# Altium PCB SNA.PcbDoc (part 1 of 6)
Units mm, origin at the board's own origin, x right, y up, seen from the top; angles counter-clockwise.
Board outline 122 x 98 mm, 4 copper layers (L1 Top Layer, L2 Inner 1, L3 Inner 2, L4 Bottom Layer), stack 1.588 mm thick; 466 components, 299 nets, 1366 pads, 4218 vias.
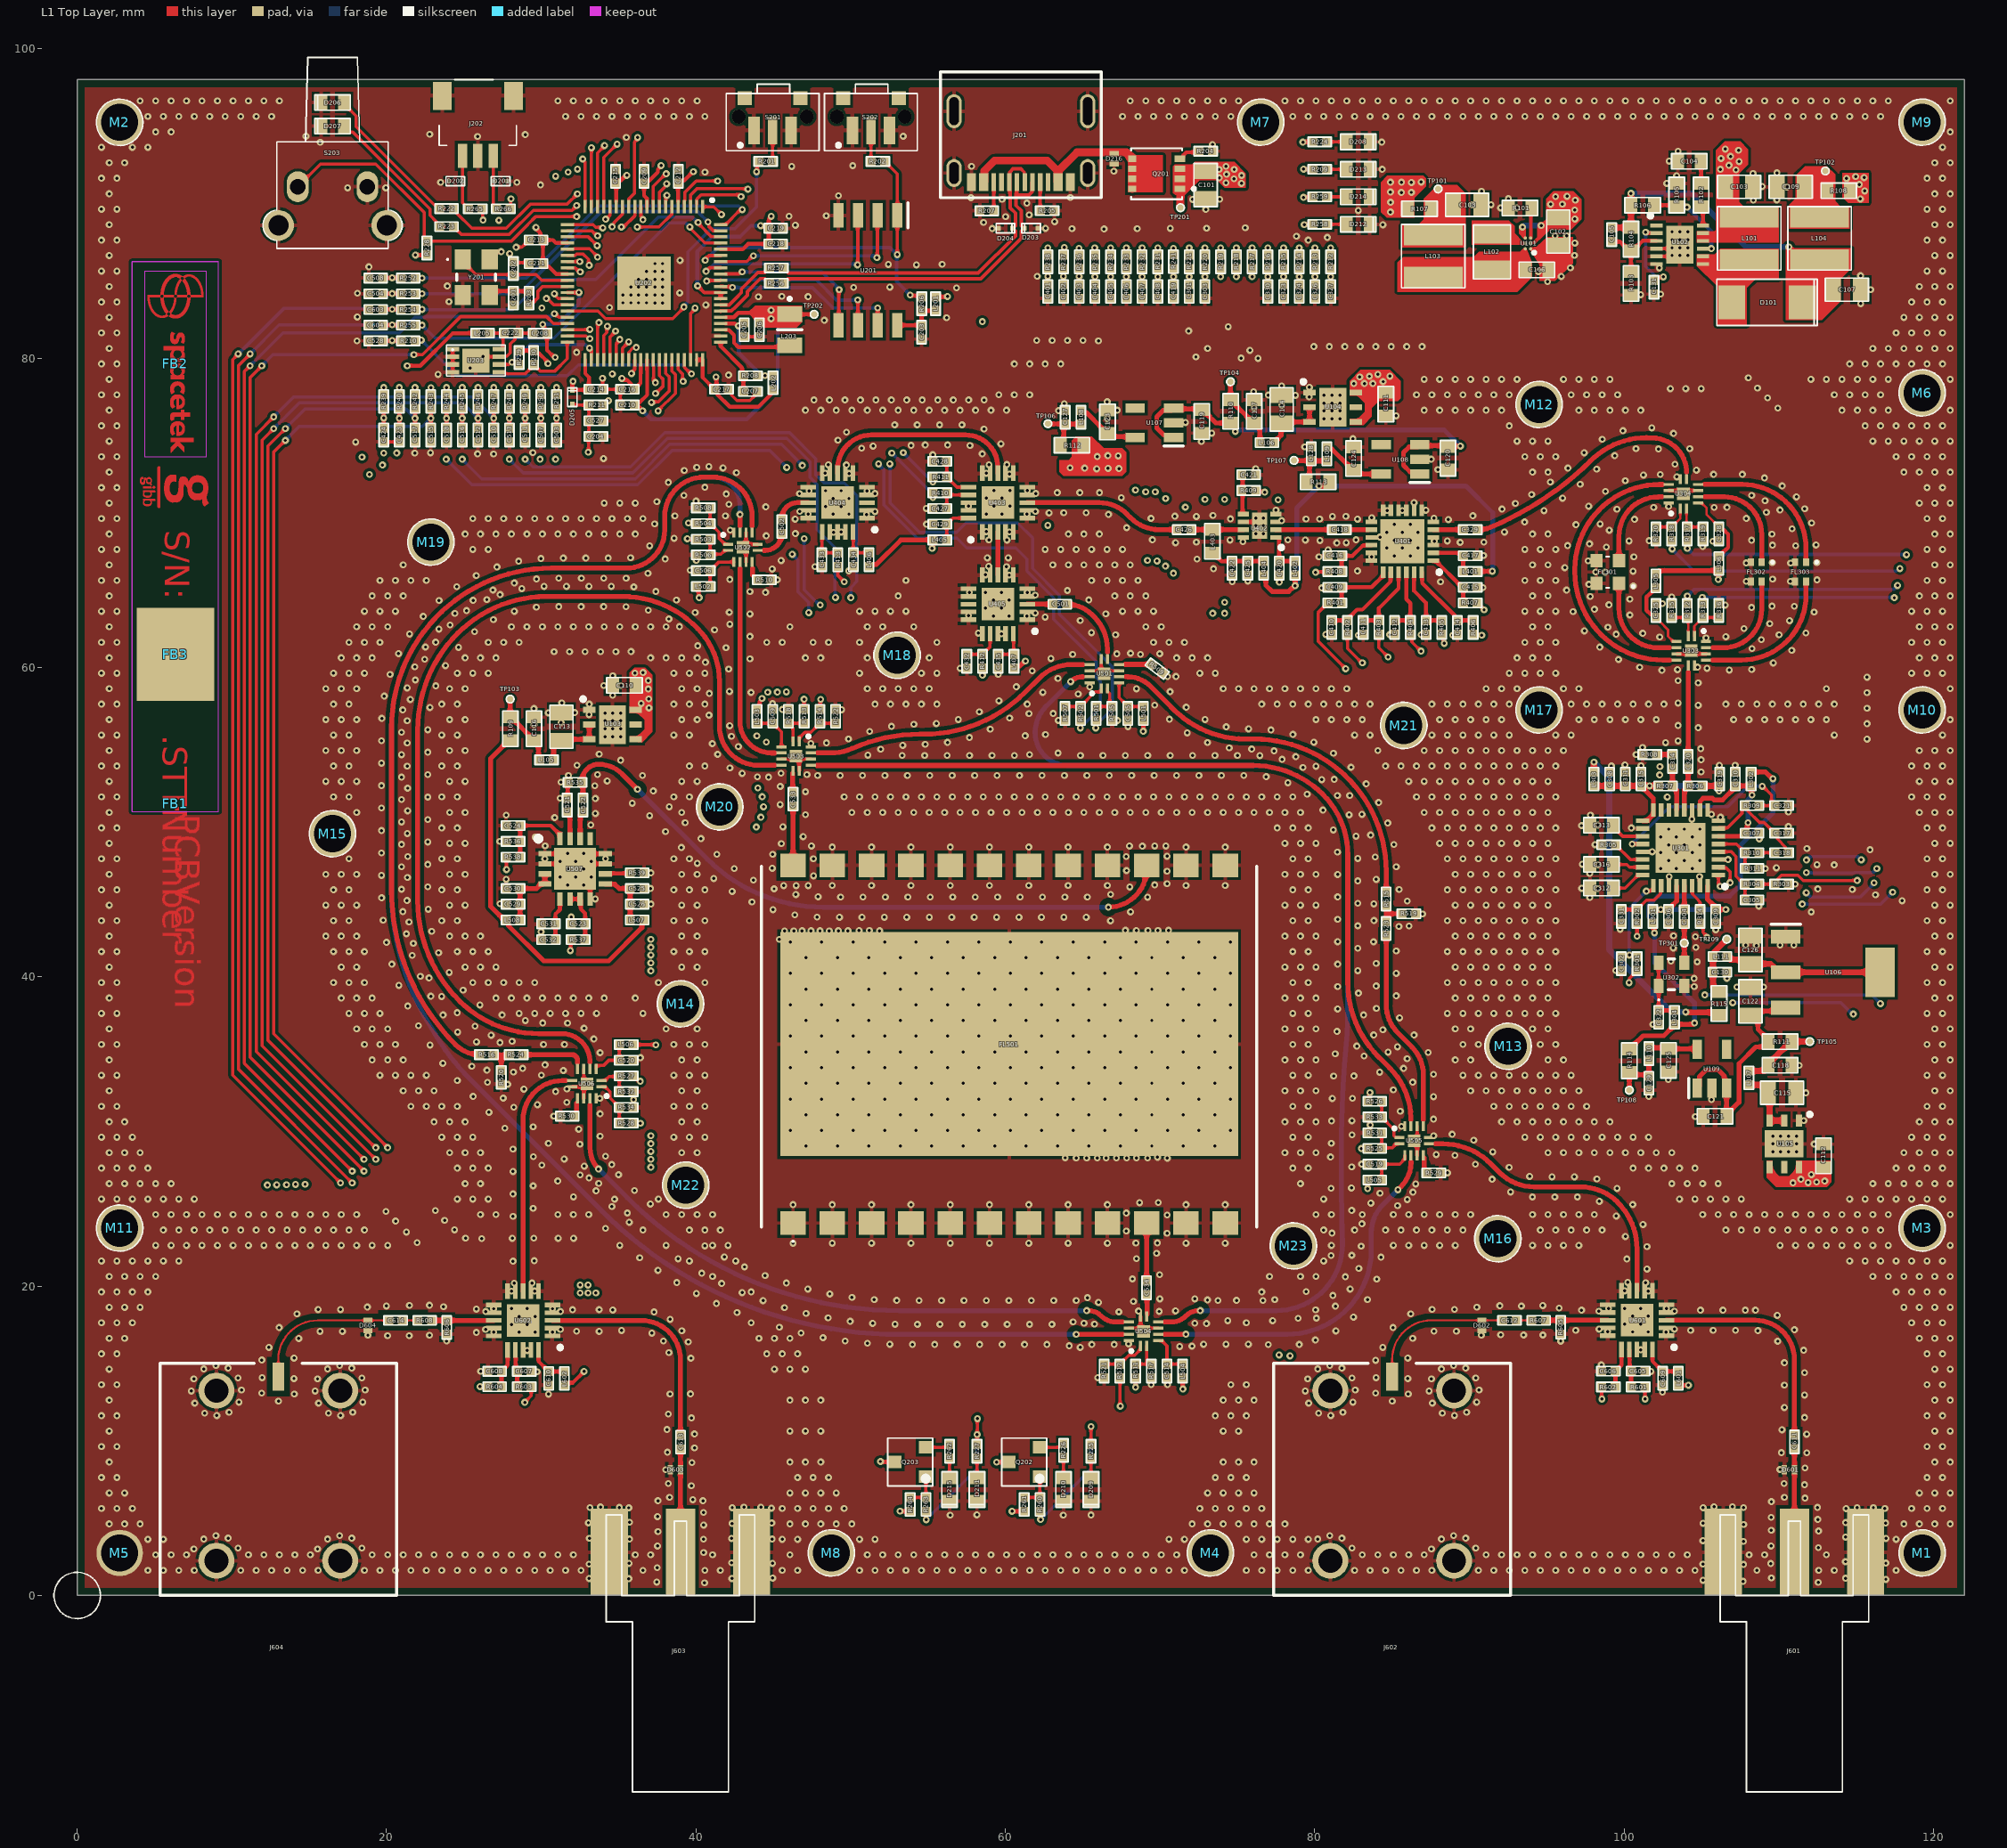
[diagram p0: L1 Top Layer view]
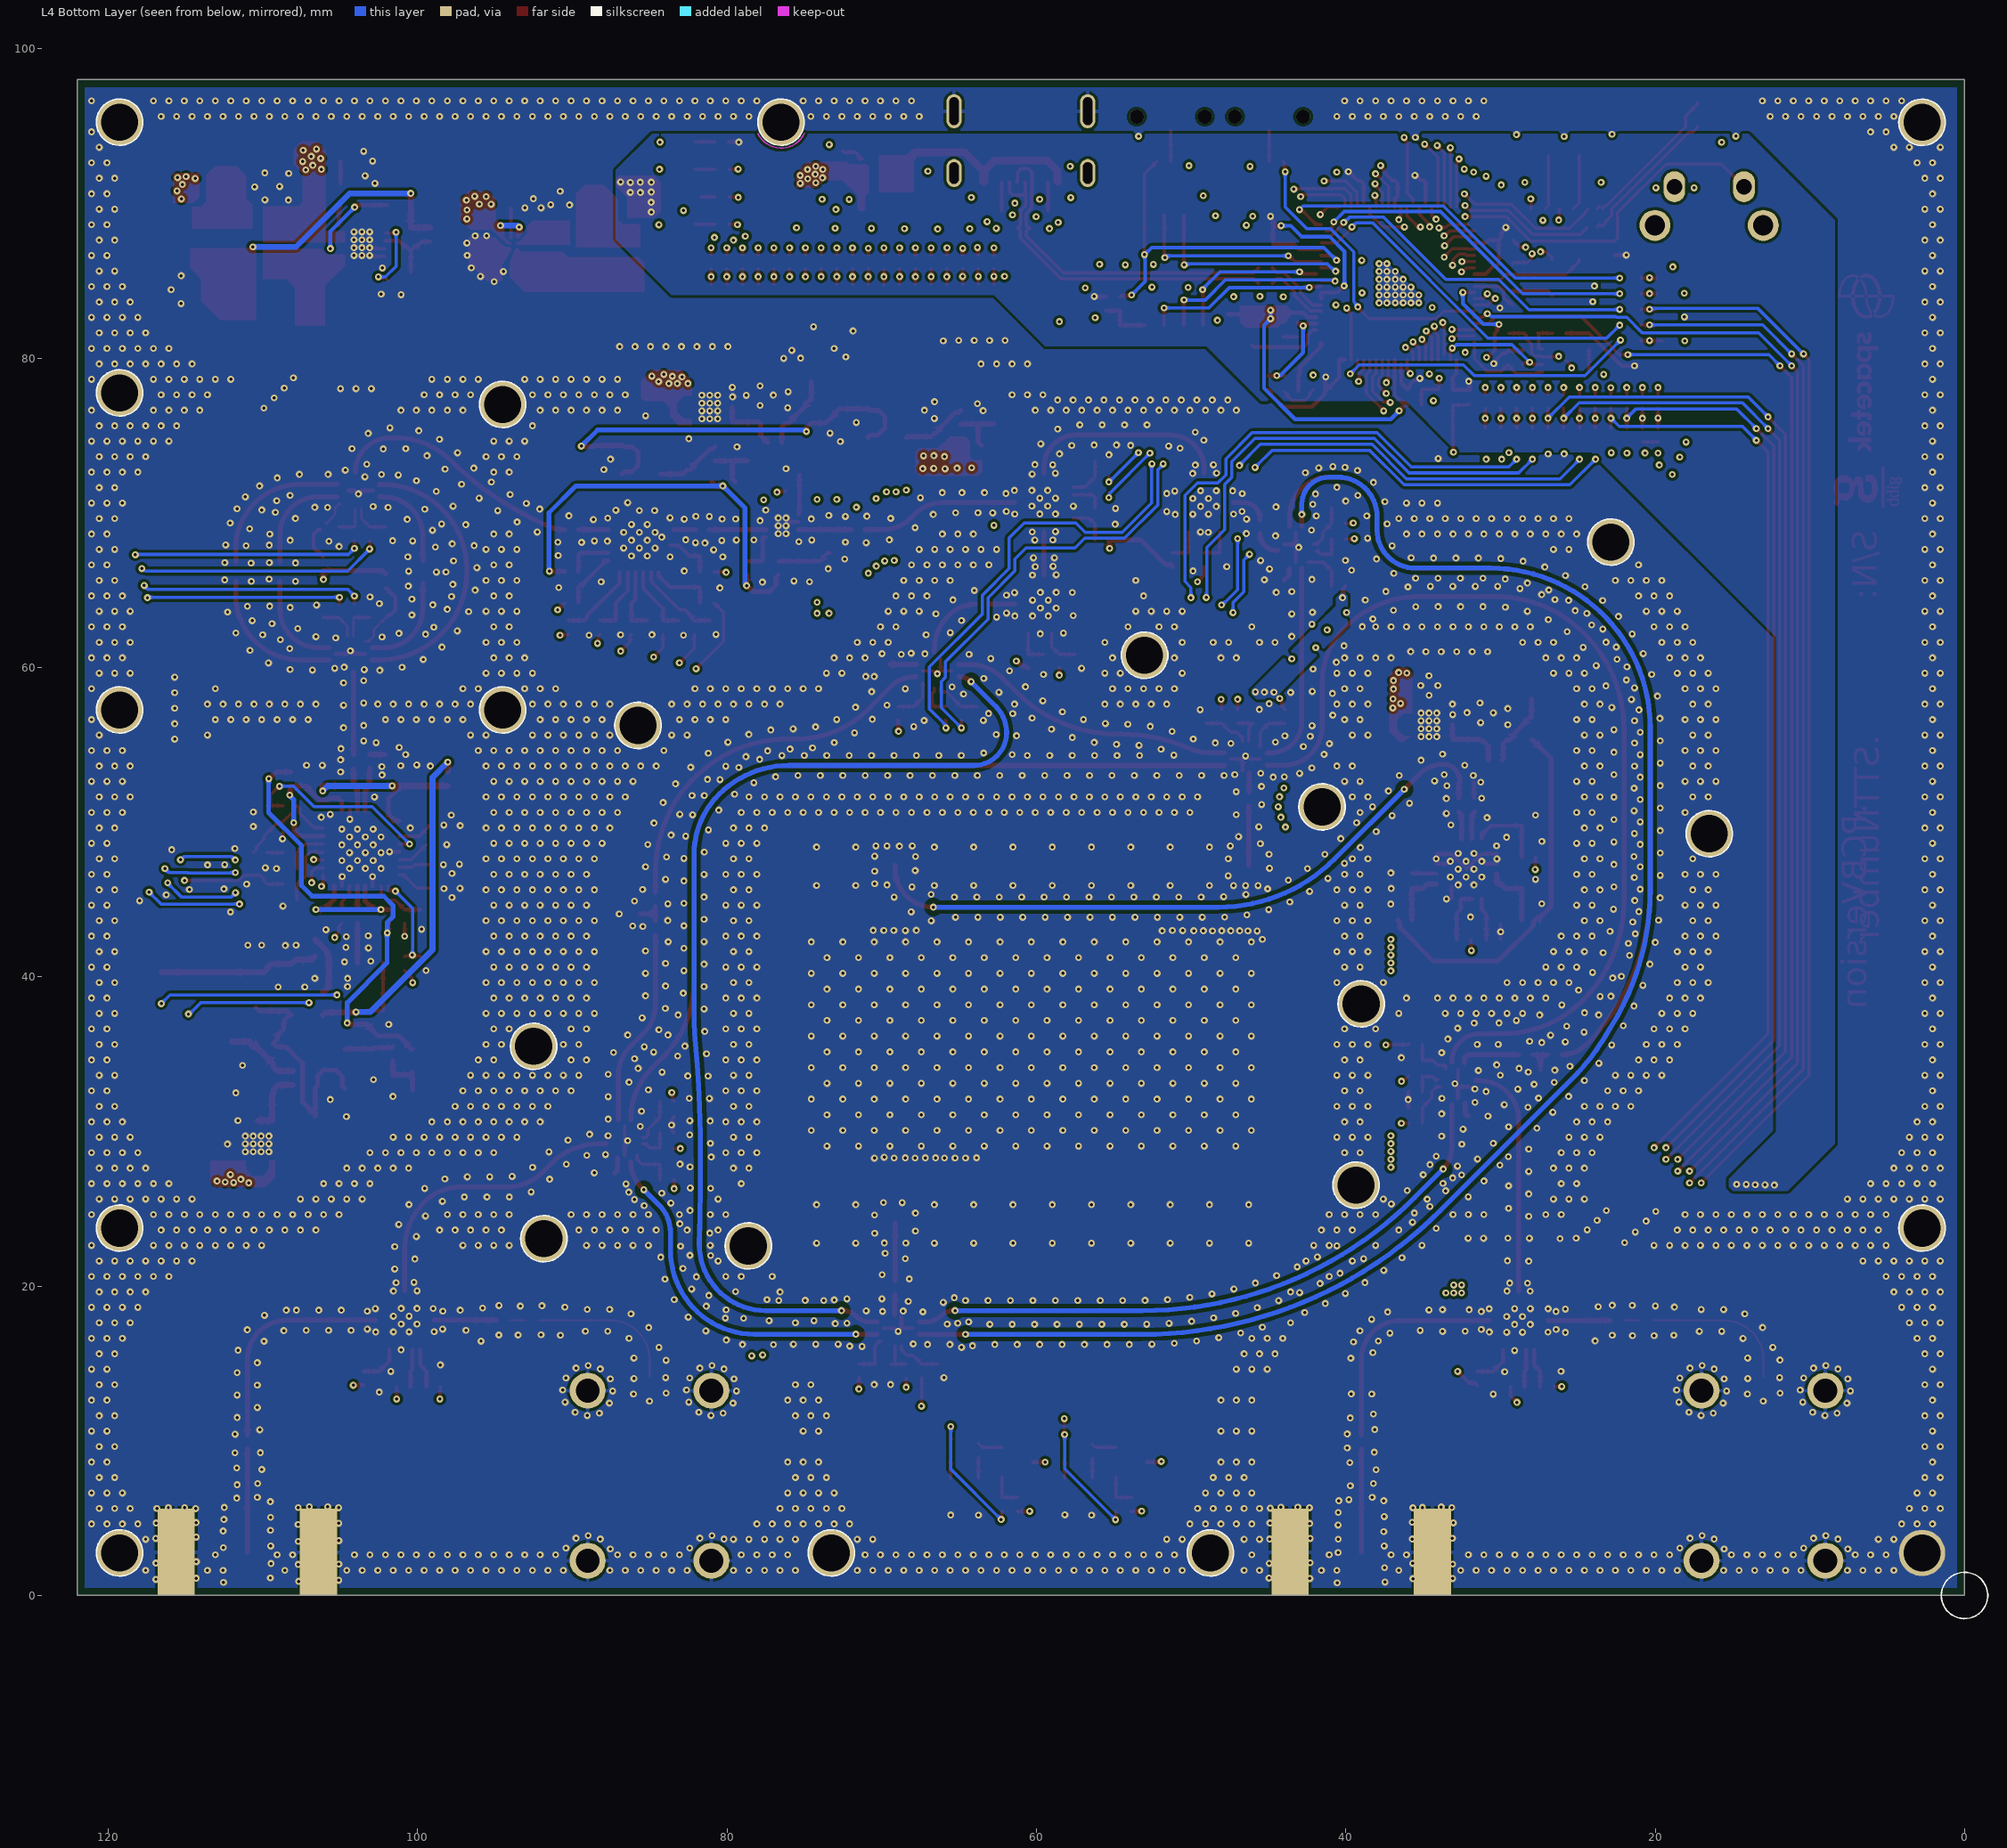
[diagram p1: L4 Bottom Layer view, seen from below]
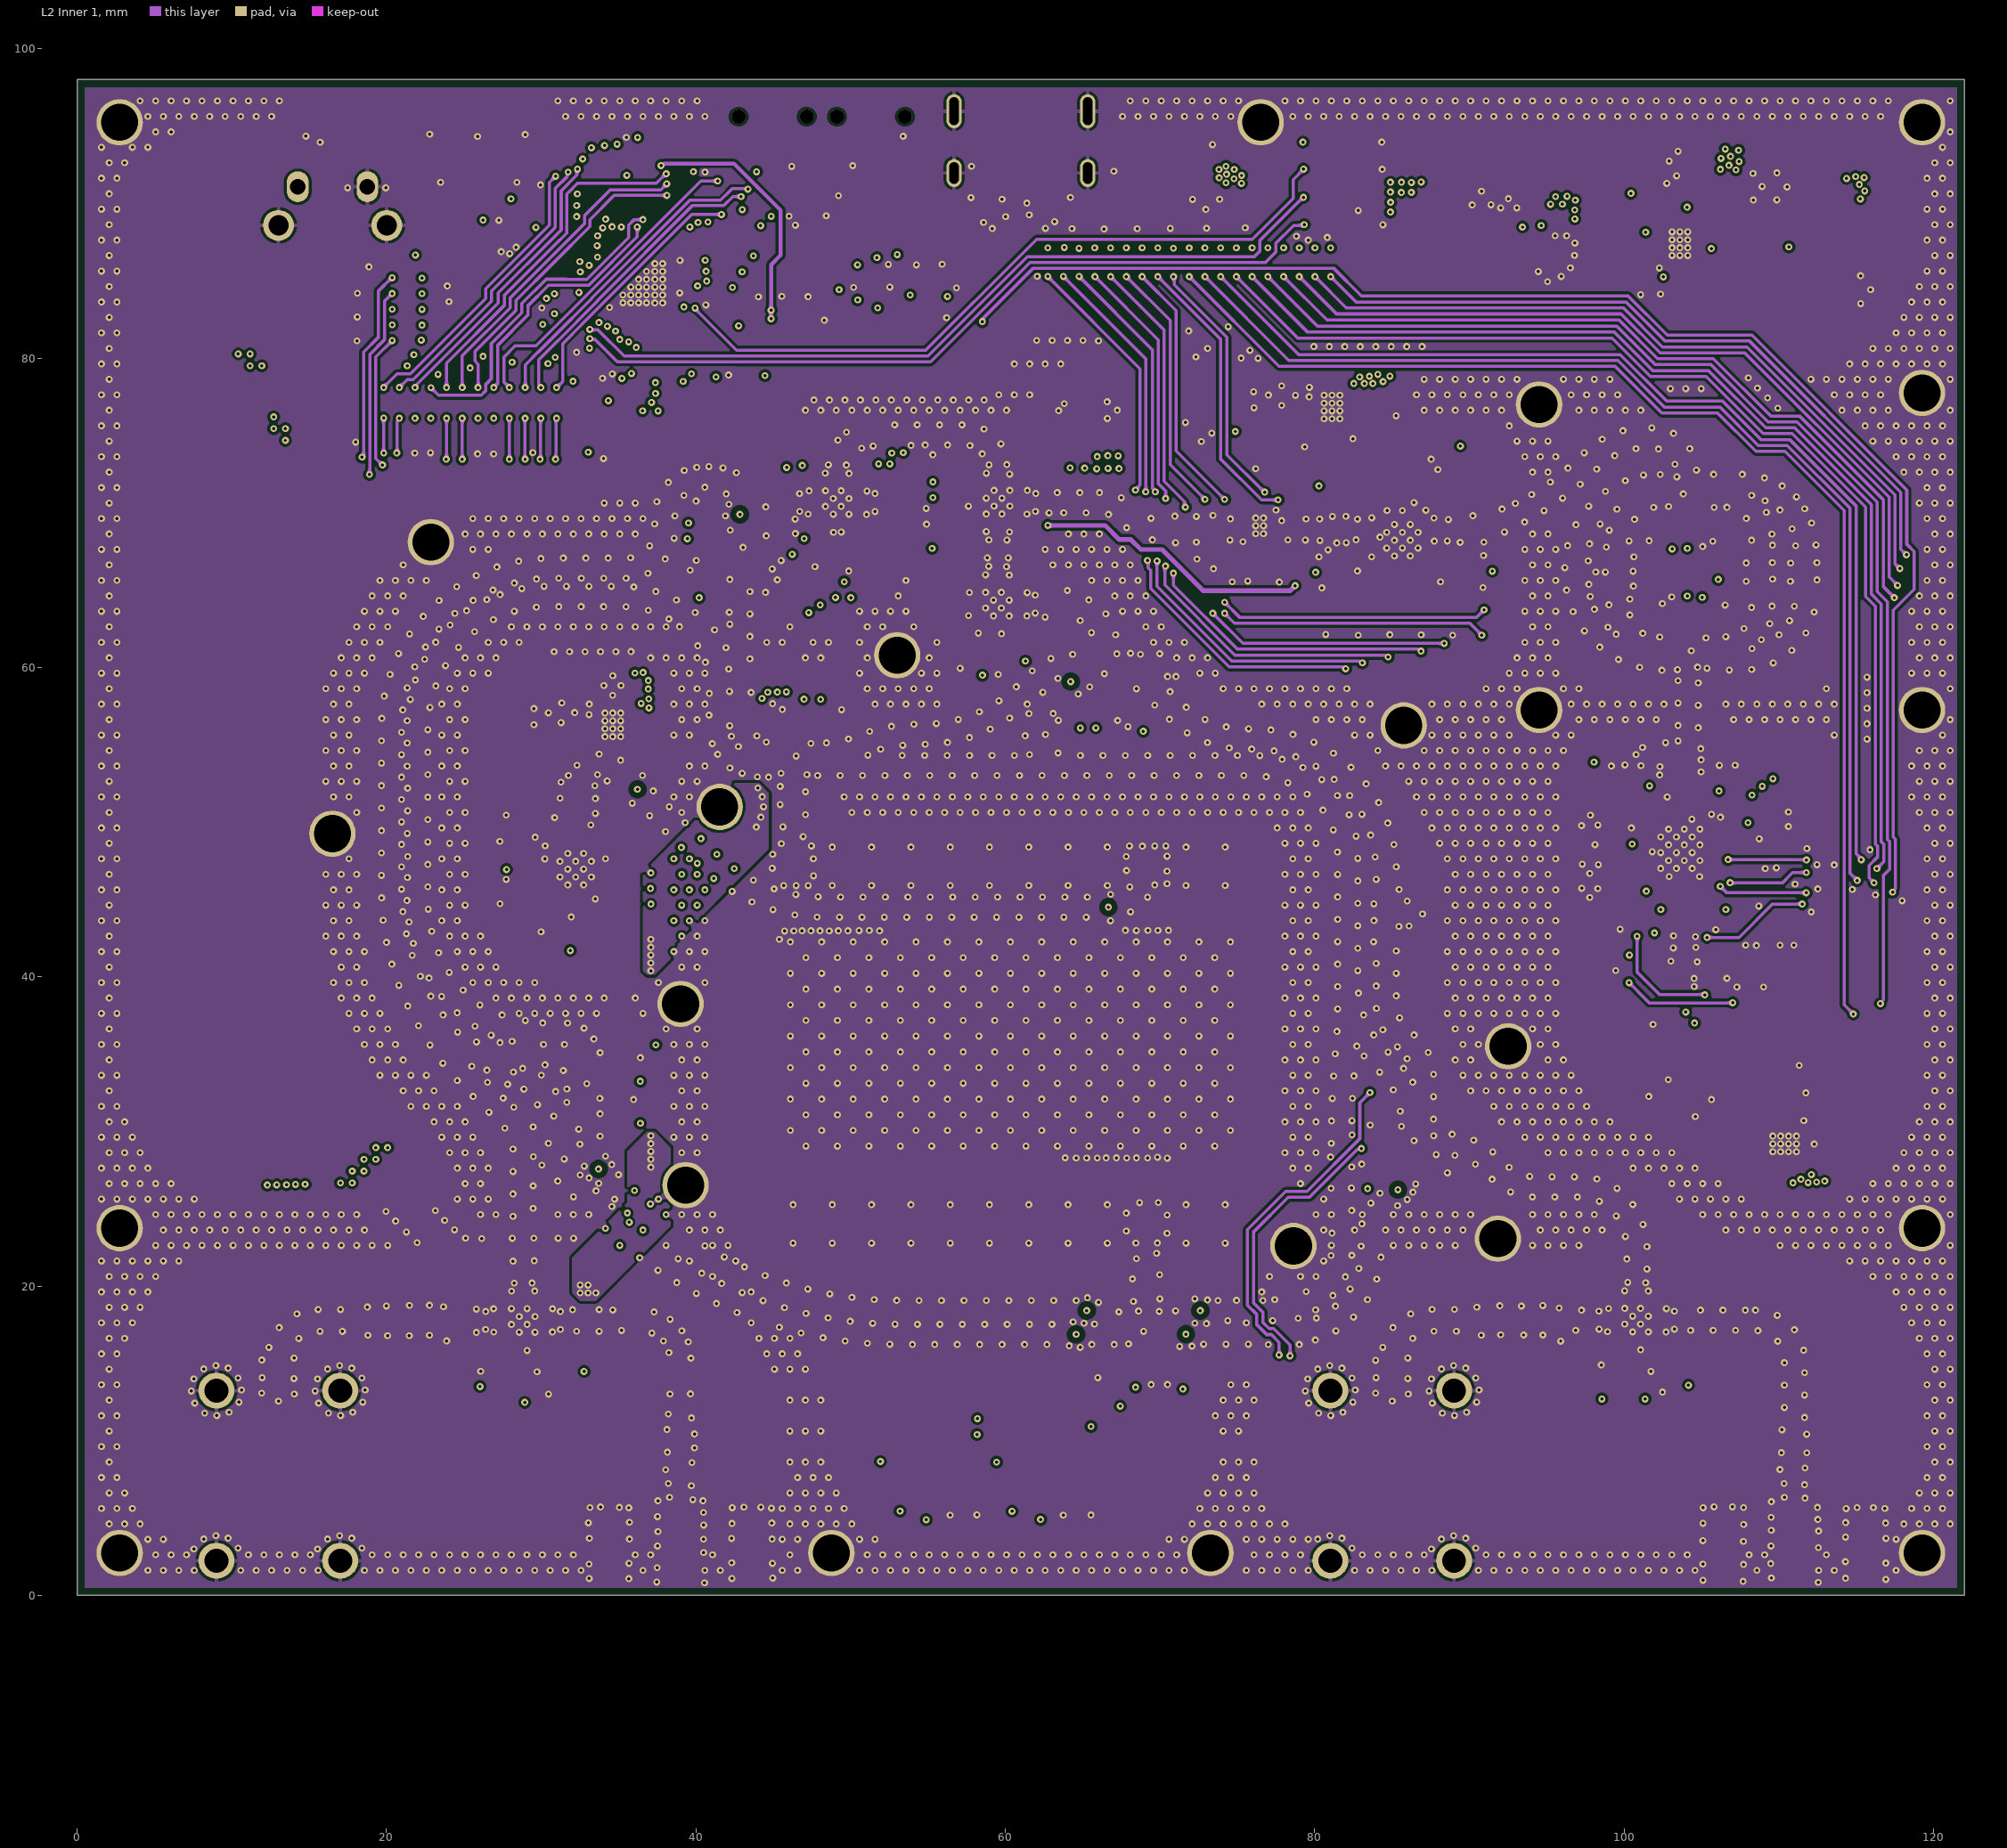
[diagram p2: L2 Inner 1]
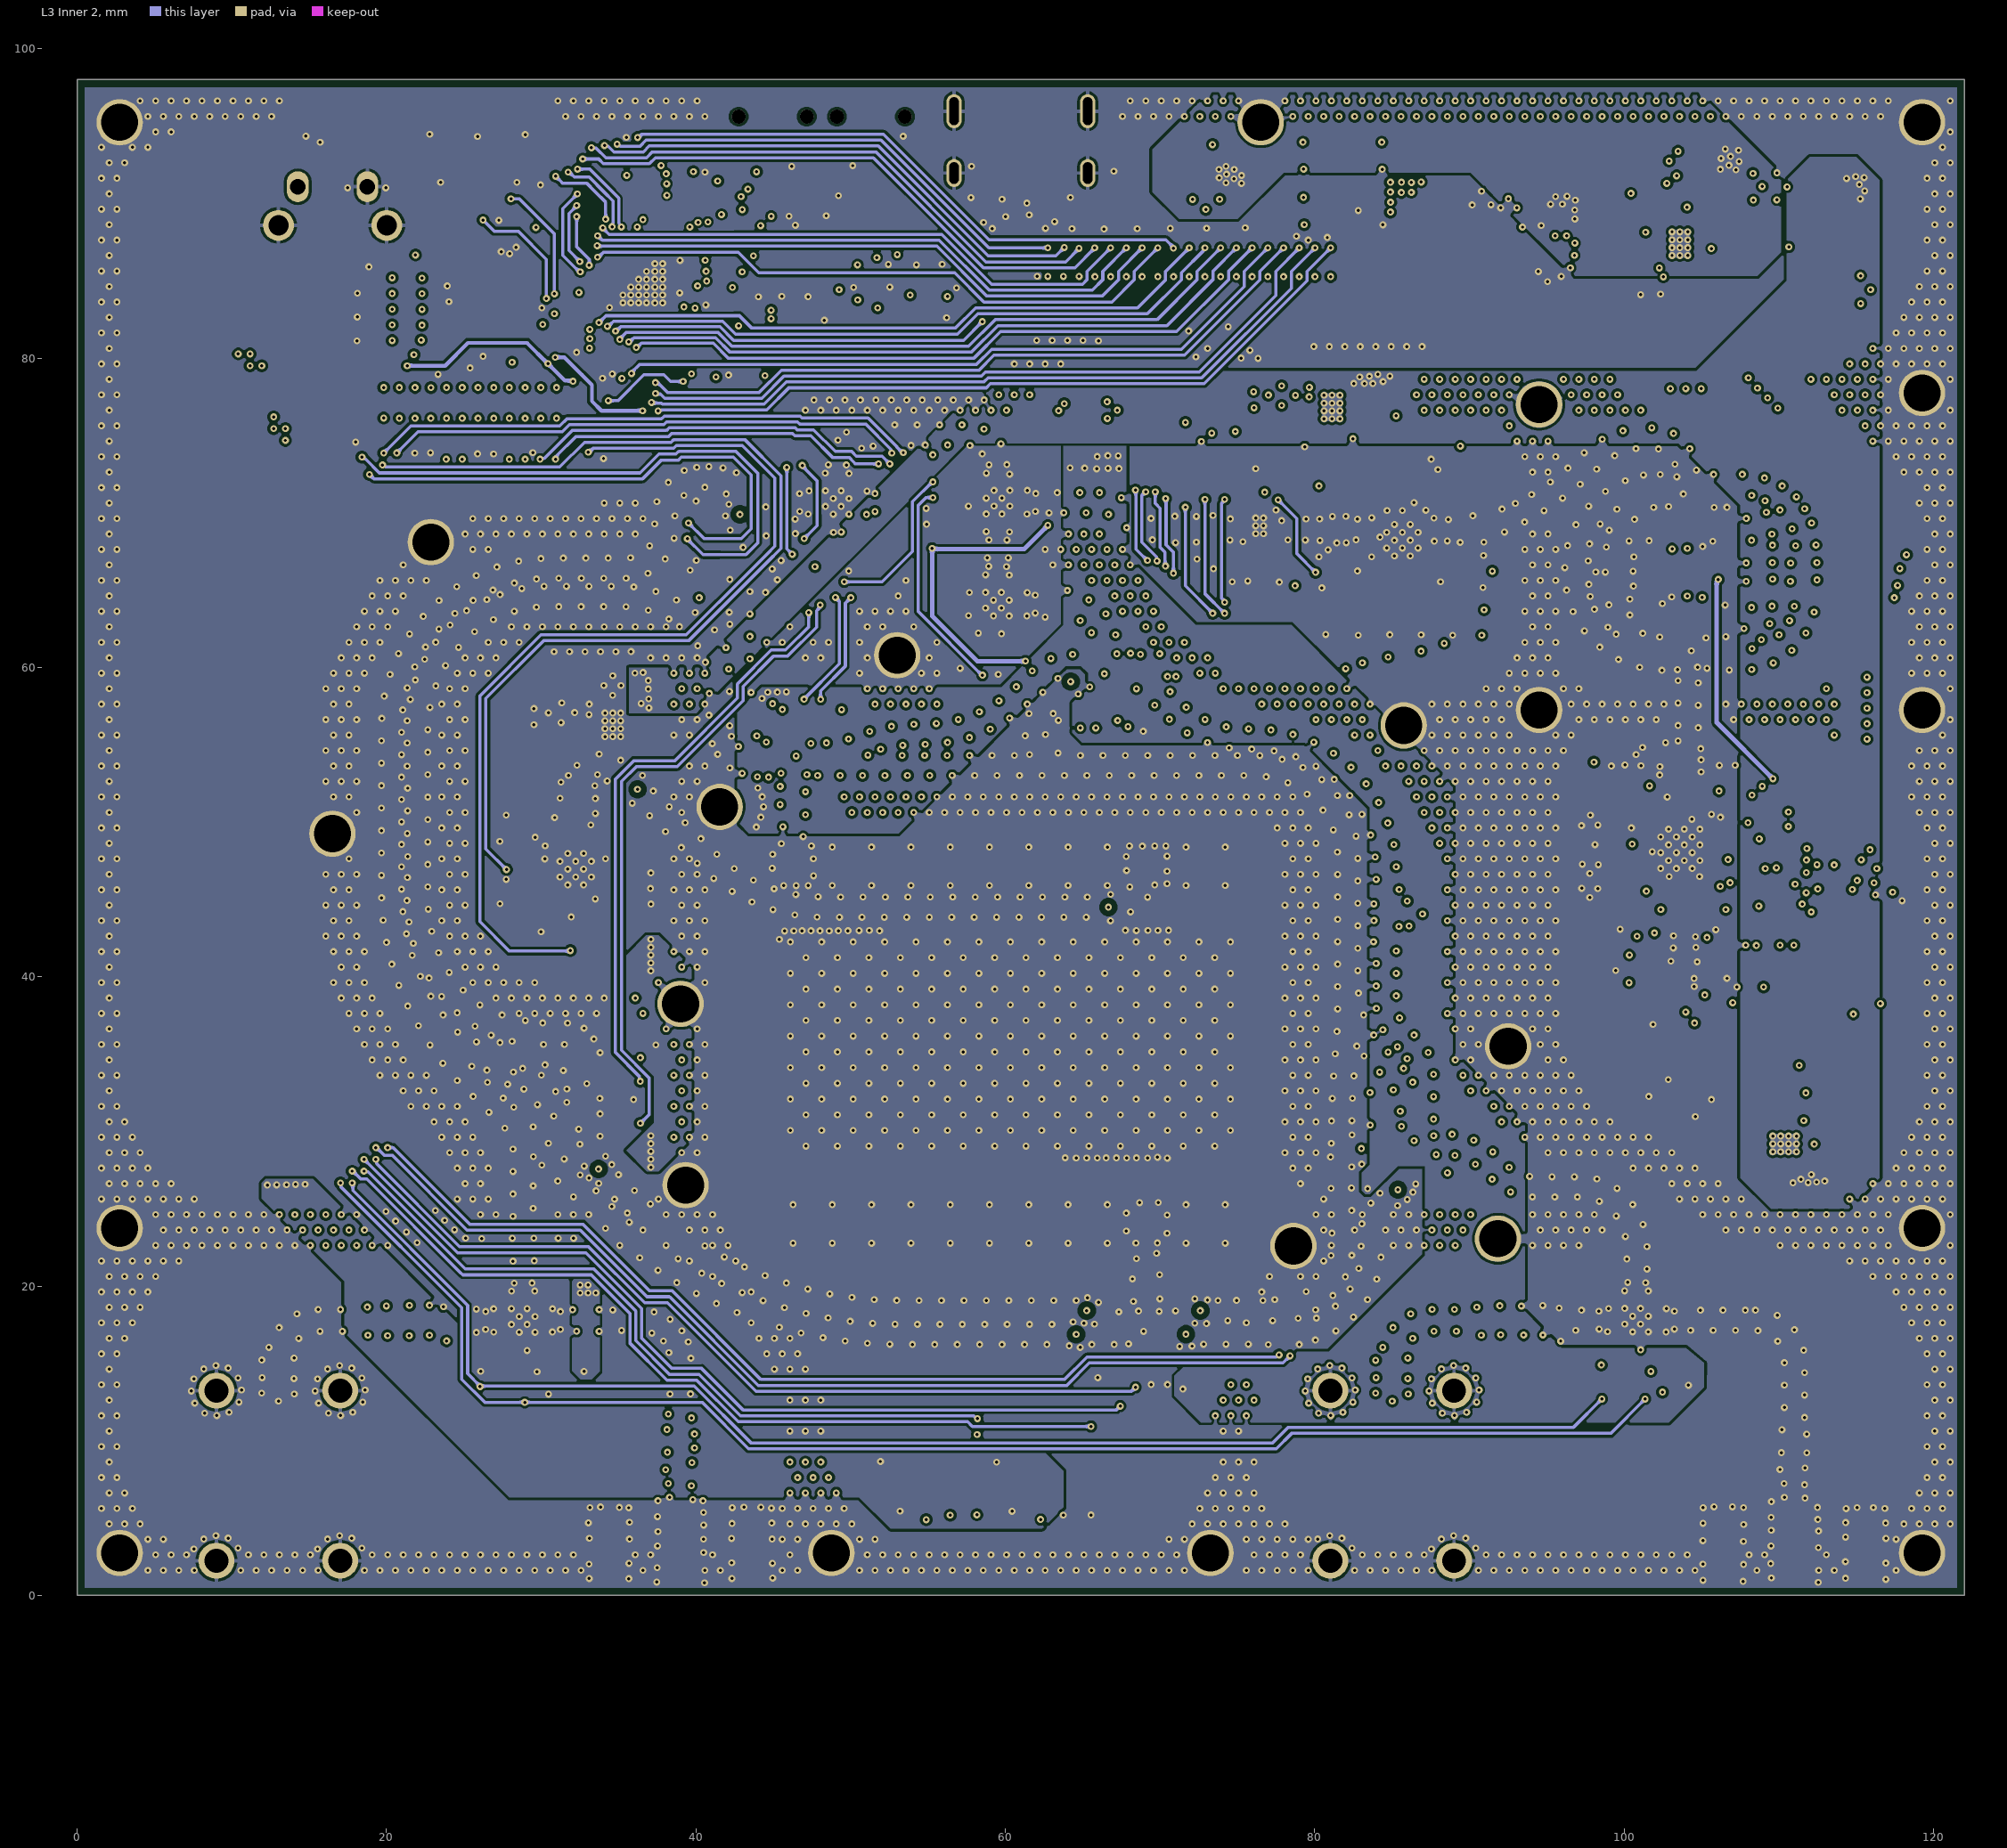
[diagram p3: L3 Inner 2]

## Layer stack, top to bottom
Top Solder 1: solder mask 0.0102, Solder Resist, Dk 3.5
L1 Top Layer: signal copper 0.036
Dielectric1: prepreg 0.2104, Prepreg, Dk 4.7
L2 Inner 1: signal copper 0.0152
Dielectric2: core 1.065, FR4, Dk 4.7
L3 Inner 2: signal copper 0.0152
Dielectric3: prepreg 0.2104, Prepreg, Dk 4.7
L4 Bottom Layer: signal copper 0.036
Bottom Solder 1: solder mask 0.0102, Solder Resist, Dk 3.5

## Board outline
0,0 122,0 122,98 0,98

## Design rules (kind name [scope] priority, off if disabled: settings)
BoardOutlineClearance BoardOutlineClearance-User [All] p1: gap=0.5 ignorepadtopadclearanceinfootprint=FALSE except(0: Arc-SplitBarrior Arc-SplitContinuation Track-SplitBarrior Track-SplitContinuation SMDPad-SplitBarrior SMDPad-SplitContinuation THPad-SplitBarrior THPad-SplitContinuation Via-SplitBarrior Via-SplitContinuation Fill-SplitBarrior Fill-SplitContinuation Poly-SplitBarrior Poly-SplitContinuation Region-SplitBarrior Region-SplitContinuation Text-SplitBarrior Text-SplitContinuation)
Clearance Clearance_Diff_Pair [InNetClass('USB_D')] p1: gap=0.152 ignorepadtopadclearanceinfootprint=FALSE
Clearance Clearance_Room [WithinRoom(     'Clearance',     'Clearance_1',     'Clearance_2',     'Clearance_3',     'Clearance_4',     'Clearance_5',     'Clearance_6',     'Clearance_7',     'Clearance_8',     'Clearance_9',     'Clearance_10',     'Clearance_11',     'Clearance_12',     'Clearance_13',     'Clearance_14',     'Clearance_15',     'Clearance_16',     'Clearance_17',     'Clearance_18',     'Clearance_19',     'Clearance_20',     'Clearance_21',     'Clearance_22',     'Clearance_23',     'Clearance_24',     'Clearance_25',     'Clearance_26',     'Clearance_27',     'Clearance_28',     'Clearance_29',     'Clearance_30',     'Clearance_31',     'Clearance_32',     'Clearance_33',     'Clearance_34',     'Clearance_35',     'Clearance_36',     'Clearance_37',     'Clearance_38',     'Clearance_39',     'Clearance_40' )] p2: gap=0.152 ignorepadtopadclearanceinfootprint=TRUE
Clearance Clearance_75_SE_Via [IsVia and InNetClass('SE_75') vs InNetClass('SE_75')] p3: gap=0.159 ignorepadtopadclearanceinfootprint=TRUE
Clearance Clearance_50_SE_Via [IsVia and InNetClass('SE_50')] p4: gap=0.358 ignorepadtopadclearanceinfootprint=TRUE
Clearance Clearance_75_SE [All vs InNetClass('SE_75')] p5: gap=0.381 ignorepadtopadclearanceinfootprint=TRUE
Clearance Clearance_50_SE [All vs InNetClass('SE_50')] p6: gap=0.254 ignorepadtopadclearanceinfootprint=TRUE
Clearance "Schematic Clearance Constraint_1" [InNetClass('USB_D')] p7: gap=0.178 ignorepadtopadclearanceinfootprint=TRUE
Clearance Clearance_main [All] p8: gap=0.178 ignorepadtopadclearanceinfootprint=TRUE
Clearance SN [HasFootprint('STT--DO--SN')] p9: gap=0.1 ignorepadtopadclearanceinfootprint=FALSE
Clearance ClearanceDiffPairs [(InDifferentialPairClass('All Differential Pairs'))] p10: gap=0.3 ignorepadtopadclearanceinfootprint=FALSE except(0: Arc-Hole Track-Hole SMDPad-Hole THPad-Hole Via-Hole Fill-Hole Poly-Hole Region-Hole Text-Hole; 0.2: Arc-Track Track-Track Track-THPad Track-Via)
ComponentClearance [All] p1: gap=0.254 collisioncheckmode=3 verticalgap=0 showdistances=FALSE
DiffPairsRouting "Schematic Differential Pairs Routing_1" [InNetClass('USB_D')] p1: maxlimit=0.152 minlimit=0.152 mostfreqgap=0.152 toplayer_minwidth=0.228 toplayer_maxwidth=0.228 toplayer_prefwidth=0.228 midlayer1_minwidth=0.228 midlayer1_maxwidth=0.228 midlayer1_prefwidth=0.228 midlayer4_minwidth=0.228 midlayer4_maxwidth=0.228 midlayer4_prefwidth=0.228 bottomlayer_minwidth=0.228 bottomlayer_maxwidth=0.228 bottomlayer_prefwidth=0.228 maxuncoupledlength=12.7
DiffPairsRouting [All] p2: maxlimit=0.6 minlimit=0.2 mostfreqgap=0.2 toplayer_minwidth=0.2 toplayer_maxwidth=1 toplayer_prefwidth=0.2 midlayer1_minwidth=0.2 midlayer1_maxwidth=1 midlayer1_prefwidth=0.2 midlayer4_minwidth=0.2 midlayer4_maxwidth=1 midlayer4_prefwidth=0.2 bottomlayer_minwidth=0.2 bottomlayer_maxwidth=1 bottomlayer_prefwidth=0.2 maxuncoupledlength=12.7
HoleSize [All] p1: absolutevalues=TRUE maxlimit=6 minlimit=0.178 maxpercent=80.000 minpercent=20.000
HoleToHoleClearance [All] p1: gap=0.3 allowstackedmicrovias=TRUE
MinimumSolderMaskSliver [All] p1: minsoldermaskwidth=0
PermittedLayers "Schematic Permitted Layers Rule" [InNet('NetFB3_1')] p1: toplayerpermitted=TRUE bottomlayerpermitted=FALSE
PlaneClearance [All] p1: clearance=0.5
PlaneConnect PlaneConnect_Vias [IsVia] p1: planeconnectstyle=Direct reliefexpansion=0.508 reliefentries=4 reliefconductorwidth=0.254 reliefairgap=0.254
PlaneConnect [All] p2: planeconnectstyle=Relief reliefexpansion=0.5 reliefentries=4 reliefconductorwidth=0.508 reliefairgap=0.178
PolygonConnect PolygonConnect_Vias [IsVia] p1: connectstyle=Direct reliefconductorwidth=0.4 reliefentries=4 polygonreliefangle="90 Angle" airgapwidth=0.3
PolygonConnect PolygonConnect_Direct-Connect [HasCompParameterValue('poly_direct_connect','true')] p2: connectstyle=Direct reliefconductorwidth=0.4 reliefentries=4 polygonreliefangle="90 Angle" airgapwidth=0.3
PolygonConnect [Not IsVia] p3: connectstyle=Relief reliefconductorwidth=0.254 reliefentries=4 polygonreliefangle="90 Angle" airgapwidth=0.178
RoomDefinition Gibb-Logo_No-Net [False vs False] p1: confinementstyle=ConfineIn formatcopy=TRUE lockcomponents=FALSE outline 3.75,73.235 8.835,73.235 8.835,69.753 3.75,69.753
RoomDefinition Clearance_31 [False vs False] p2: confinementstyle=ConfineIn formatcopy=TRUE lockcomponents=FALSE outline 19.396,18.265 18.196,18.265 18.196,16.655 19.396,16.655
RoomDefinition Clearance_30 [False vs False] p3: confinementstyle=ConfineIn formatcopy=TRUE lockcomponents=FALSE outline 91.396,18.266 90.196,18.266 90.196,16.657 91.396,16.657
RoomDefinition Clearance_29 [False vs False] p4: confinementstyle=ConfineIn formatcopy=TRUE lockcomponents=FALSE outline 30.799,78.922 42.564,78.922 42.564,90.745 30.799,90.745
RoomDefinition Clearance_28 [False vs False] p5: confinementstyle=ConfineIn formatcopy=TRUE lockcomponents=FALSE outline 106.677,87.536 104.453,87.536 104.453,86.566 106.677,86.566
RoomDefinition Clearance_27 [False vs False] p6: confinementstyle=ConfineIn formatcopy=TRUE lockcomponents=FALSE outline 94.377,88.211 93.177,88.211 93.177,86.611 94.377,86.611
RoomDefinition Clearance_26 [False vs False] p7: confinementstyle=ConfineIn formatcopy=TRUE lockcomponents=FALSE outline 44.561,66.241 44.561,69.291 41.511,69.291 41.511,66.241
RoomDefinition Clearance_1 [False vs False] p8: confinementstyle=ConfineIn formatcopy=TRUE lockcomponents=FALSE outline 30.157,17.029 31.474,17.029 31.474,18.553 30.157,18.553
RoomDefinition Clearance_22 [False vs False] p9: confinementstyle=ConfineIn formatcopy=TRUE lockcomponents=FALSE outline 47.857,71.369 46.504,71.369 46.504,69.845 47.857,69.845
RoomDefinition Clearance_23 [False vs False] p10: confinementstyle=ConfineIn formatcopy=TRUE lockcomponents=FALSE outline 60.797,63.338 62.162,63.338 62.162,64.862 60.797,64.862
RoomDefinition Clearance_5 [False vs False] p11: confinementstyle=ConfineIn formatcopy=TRUE lockcomponents=FALSE outline 103.129,46.338 103.129,44.232 104.653,44.232 104.653,46.338
RoomDefinition Clearance_4 [False vs False] p12: confinementstyle=ConfineIn formatcopy=TRUE lockcomponents=FALSE outline 104.399,50.255 104.399,52.361 102.875,52.361 102.875,50.255
RoomDefinition Clearance_25 [False vs False] p13: confinementstyle=ConfineIn formatcopy=TRUE lockcomponents=FALSE outline 64.87,58.065 67.92,58.065 67.92,61.115 64.87,61.115
RoomDefinition Clearance_24 [False vs False] p14: confinementstyle=ConfineIn formatcopy=TRUE lockcomponents=FALSE outline 60.809,69.89 62.162,69.89 62.162,71.414 60.809,71.414
RoomDefinition Clearance_21 [False vs False] p15: confinementstyle=ConfineIn formatcopy=TRUE lockcomponents=FALSE outline 49.898,71.956 49.898,73.303 48.374,73.303 48.374,71.956
RoomDefinition Clearance_18 [False vs False] p16: confinementstyle=ConfineIn formatcopy=TRUE lockcomponents=FALSE outline 60.229,71.928 60.229,73.303 58.705,73.303 58.705,71.928
RoomDefinition Clearance_17 [False vs False] p17: confinementstyle=ConfineIn formatcopy=TRUE lockcomponents=FALSE outline 58.751,69.359 58.751,68.003 60.275,68.003 60.275,69.359
RoomDefinition Clearance_16 [False vs False] p18: confinementstyle=ConfineIn formatcopy=TRUE lockcomponents=FALSE outline 60.26,65.344 60.26,66.735 58.736,66.735 58.736,65.344
RoomDefinition Clearance_14 [False] p19: confinementstyle=ConfineIn formatcopy=TRUE lockcomponents=FALSE outline 29.563,19.086 29.563,20.43 28.039,20.43 28.039,19.086
RoomDefinition Clearance_13 [False vs False] p20: confinementstyle=ConfineIn formatcopy=TRUE lockcomponents=FALSE outline 47.997,52.742 47.997,55.792 44.947,55.792 44.947,52.742
RoomDefinition Clearance_20 [False vs False] p21: confinementstyle=ConfineIn formatcopy=TRUE lockcomponents=FALSE outline 70.457,15.552 70.457,18.602 67.407,18.602 67.407,15.552
RoomDefinition Clearance_12 [False vs False] p22: confinementstyle=ConfineIn formatcopy=TRUE lockcomponents=FALSE outline 87.942,30.921 84.892,30.921 84.892,27.871 87.942,27.871
RoomDefinition Clearance_19 [False vs False] p23: confinementstyle=ConfineIn formatcopy=TRUE lockcomponents=FALSE outline 31.424,31.561 34.474,31.561 34.474,34.611 31.424,34.611
RoomDefinition Clearance_15 [False vs False] p24: confinementstyle=ConfineIn formatcopy=TRUE lockcomponents=FALSE outline 101.576,19.108 101.576,20.442 100.052,20.442 100.052,19.108
RoomDefinition Clearance_11 [False vs False] p25: confinementstyle=ConfineIn formatcopy=TRUE lockcomponents=FALSE outline 78.935,68.156 78.935,69.681 77.124,69.681 77.124,68.156
RoomDefinition Clearance_10 [False vs False] p26: confinementstyle=ConfineIn formatcopy=TRUE lockcomponents=FALSE outline 74.437,69.722 74.437,68.197 76.248,68.197 76.248,69.722
RoomDefinition Clearance_9 [False vs False] p27: confinementstyle=ConfineIn formatcopy=TRUE lockcomponents=FALSE outline 88.291,68.113 88.291,69.637 87.297,69.637 87.297,68.113
RoomDefinition Clearance_8 [False vs False] p28: confinementstyle=ConfineIn formatcopy=TRUE lockcomponents=FALSE outline 83.041,69.68 83.041,68.156 84.151,68.156 84.151,69.68
RoomDefinition Clearance_6 [False] p29: confinementstyle=ConfineIn formatcopy=TRUE lockcomponents=FALSE outline 105.858,59.551 105.858,62.601 102.808,62.601 102.808,59.551
RoomDefinition Clearance_7 [False vs False] p30: confinementstyle=ConfineIn formatcopy=TRUE lockcomponents=FALSE outline 105.35,69.702 105.35,72.752 102.3,72.752 102.3,69.702
RoomDefinition Clearance [False vs False] p31: confinementstyle=ConfineIn formatcopy=TRUE lockcomponents=FALSE outline 26.174,17.018 27.506,17.018 27.506,18.542 26.174,18.542
RoomDefinition Clearance_2 [False vs False] p32: confinementstyle=ConfineIn formatcopy=TRUE lockcomponents=FALSE outline 102.128,17.029 103.474,17.029 103.474,18.553 102.128,18.553
RoomDefinition Clearance_3 [False vs False] p33: confinementstyle=ConfineIn formatcopy=TRUE lockcomponents=FALSE outline 99.511,18.554 98.174,18.554 98.174,17.03 99.511,17.03
RoutingVias RoutingVias_50_SE [InNetClass('SE_50')] p1: holewidth=0.2 width=0.45 viastyle="Through Hole" minholewidth=0.2 minwidth=0.45 maxholewidth=0.2 maxwidth=0.45
RoutingVias RoutingVias_75_SE [InNetClass('SE_75')] p2: holewidth=0.2 width=0.45 viastyle="Through Hole" minholewidth=0.2 minwidth=0.45 maxholewidth=0.2 maxwidth=0.45
RoutingVias [All] p3: holewidth=0.2 width=0.45 viastyle="Through Hole" minholewidth=0.2 minwidth=0.45 maxholewidth=0.3 maxwidth=0.6
SilkToSilkClearance [All] p1: silktosilkclearance=0
SilkToSolderMaskClearance SilkscreenOverComponentPads [IsPad] p1: minsilkscreentomaskgap=0 clearancetoexposedcopper=TRUE
SolderMaskExpansion SolderMaskExpansionVia [IsVia] p1: expansion=0 istentingtop=TRUE
SolderMaskExpansion [All] p2: expansion=0.1 istentingtop=FALSE
SupplyNets "Schematic Supply Nets_7" [InNet('3.3V RF ATTEN-AMP')] p1: voltage=0.000
SupplyNets "Schematic Supply Nets_13" [InNet('3.3V RF SW.')] p2: voltage=0.000
SupplyNets "Schematic Supply Nets_12" [InNet('6V')] p3: voltage=0.000
SupplyNets "Schematic Supply Nets_10" [InNet('5V')] p4: voltage=0.000
SupplyNets "Schematic Supply Nets_9" [InNet('1.1V')] p5: voltage=0.000
SupplyNets "Schematic Supply Nets_8" [InNet('3.3V RF SRC - RF')] p6: voltage=0.000
SupplyNets "Schematic Supply Nets_6" [InNet('5V RF Log Det.')] p7: voltage=0.000
SupplyNets "Schematic Supply Nets_5" [InNet('3.3V RF SRC - CP')] p8: voltage=0.000
SupplyNets "Schematic Supply Nets_3" [InNet('3.3V')] p9: voltage=0.000
SupplyNets "Schematic Supply Nets_2" [InNet('5V RF SRC')] p10: voltage=0.000
SupplyNets "Schematic Supply Nets_1" [InNet('5V RF')] p11: voltage=0.000
SupplyNets "Schematic Supply Nets" [InNet('GND')] p12: voltage=0.000
UnConnectedPin [All] p1:
UnRoutedNet [Not (WithinRoom('Gibb-Logo_No-Net'))] p1:
Width Width_50_SE [InNetClass('SE_50')] p1: maxlimit=0.32 minlimit=0.32 preferedwidth=0.32
Width Width_75_SE [InNetClass('SE_75')] p2: maxlimit=0.128 minlimit=0.128 preferedwidth=0.128
Width Width_Pwr_1A [InNetClass('1A')] p3: maxlimit=0.508 minlimit=0.381 preferedwidth=0.508
Width Width_Pwr_0.5A [InNetClass('0.5A')] p4: maxlimit=0.381 minlimit=0.254 preferedwidth=0.381
Width Width_Pwr_0.2A [InNetClass('0.2A')] p5: maxlimit=0.305 minlimit=0.254 preferedwidth=0.305
Width LOGO [HasFootprint('STT--DO--Logo')] p6: maxlimit=4 minlimit=0.1 preferedwidth=0.3 minimp=50.000000 maximp=50.000000 favimp=50.000000
Width [All] p7: maxlimit=0.254 minlimit=0.152 preferedwidth=0.203
20 further rules are at their usual default settings.

## Classes and differential pairs
differential pair class USB_D: USB_D USB_D_TER
net class USB_D: USB_D_N USB_D_P USB_D_TER_N USB_D_TER_P
net class SE_75: NetC612_1 NetC612_2 NetC614_1 NetC614_2
net class SE_50: F_REF NetC304_2 NetC314_1 NetC314_2 NetC320_1 NetC320_2 NetC329_1 NetC329_2 NetC418_1 NetC418_2 NetC426_1 NetC426_2 NetC501_1 NetC501_2 NetC502_1 NetC502_2 NetC521_2 NetC522_2 NetC533_1 NetC533_2 NetC534_1 NetC534_2 NetC611_1 NetC611_2 NetC613_1 NetC613_2 NetFL301_1 NetFL301_2 NetFL302_1 NetFL302_2 NetFL303_1 NetFL303_2 NetR509_2 NetR510_2 NetR515_1 NetR516_2 NetR523_2 NetR524_1 NetR529_2 NetR530_2 NetR605_1 NetR606_1 NetU303_6 NetU403_3 NetU403_13 NetU501_9 NetU501_11 NetU502_4 NetU502_11 NetU503_6 NetU503_9 NetU504_4 NetU504_9 NetU505_7 NetU506_7 RF_COUPLED
net class 1A: 5V 6V NetC105_2 NetC109_2 NetD216_2
net class 0.5A: 3.3V "3.3V RF SRC - RF" "5V RF SRC" NetC106_2 NetC108_2 NetC115_2 NetC118_2 NetC126_2 NetC130_2 NetC308_1
net class 0.2A: 1.1V "3.3V RF ATTEN-AMP" "3.3V RF SRC - CP" "3.3V RF SW." "5V RF" "5V RF Log Det." NetC113_2 NetC114_2 NetC116_2 NetC117_2 NetC123_2 NetC124_2 NetC125_2 NetC127_2 NetC128_2 NetC129_2 NetC203_2 NetC205_2 NetC306_1 NetC307_1 NetC417_1 NetC420_2 NetC422_2 NetC525_2 NetC529_2
component class "U_RF Source": C301 C302 C303 C304 C305 C306 C307 C308 C309 C310 C311 C312 C313 C314 C315 C316 C317 C318 C319 C320 C321 C322 C323 C324 C325 C326 C327 C328 C329 C330 C331 FL301 FL302 FL303 L301 L302 L303 L304 L305 L306 R301 R302 R303 R304 R305 R306 R307 R308 R309 R310 R311 R312 R313 R314 R315 R316 R317 R318 R319 R320 TP301 U301 U302 U303 U304
component class "U_RF Ports": C603 C604 C605 C606 C607 C608 C609 C610 C611 C612 C613 C614 D601 D602 D603 D604 J601 J602 J603 J604 L601 L602 R601 R602 R603 R604 R605 R606 R607 R608 U601 U602
component class "U_RF Direction Coupler": C501 C502 C503 C504 C505 C506 C507 C508 C509 C510 C511 C512 C513 C514 C515 C516 C517 C518 C519 C520 C521 C522 C523 C524 C525 C526 C527 C528 C529 C530 C531 C532 C533 C534 FL501 L501 L502 L503 L504 L505 L506 L507 L508 R501 R502 R503 R504 R505 R506 R507 R508 R509 R510 R511 R512 R513 R514 R515 R516 R517 R518 R519 R520 R521 R522 R523 R524 R525 R526 R527 R528 R529 R530 R531 R532 R533 R534 R535 R536 R537 R538 R539 U501 U502 U503 U504 U505 U506 U507
component class "U_RF Attenuation Amp": C401 C402 C403 C404 C405 C406 C407 C408 C409 C410 C411 C412 C413 C414 C415 C416 C417 C418 C419 C420 C421 C422 C423 C424 C425 C426 C427 C428 C429 C432 C433 C434 C435 L401 L402 L403 L404 L405 L406 L407 R401 R402 R403 R404 R405 R406 R407 R408 R409 R410 R411 R412 R413 U401 U402 U403 U404 U405
component class U_Power: C101 C102 C103 C104 C105 C106 C107 C108 C109 C110 C111 C112 C113 C114 C115 C116 C117 C118 C119 C120 C121 C122 C123 C124 C125 C126 C127 C128 C129 C130 C131 D101 L101 L102 L103 L104 L105 L106 L107 L108 L109 L110 L111 R101 R102 R103 R104 R105 R106 R107 R108 R109 R110 R111 R112 R113 R114 R115 TP101 TP102 TP103 TP104 TP105 TP106 TP107 TP108 TP109 U101 U102 U103 U104 U105 U106 U107 U108 U109
component class U_MCU: C201 C202 C203 C204 C205 C206 C207 C208 C209 C210 C211 C212 C213 C214 C215 C216 C217 C218 C219 C222 D201 D202 D203 D204 D205 D206 D207 D208 D209 D210 D211 D212 D213 D214 D215 D216 J201 J202 L201 L202 L203 L205 Q201 Q202 Q203 R201 R202 R203 R204 R205 R206 R207 R208 R209 R210 R211 R212 R213 R214 R215 R216 R217 R218 R219 R220 R221 R222 R223 R224 R225 R226 R227 R228 R229 R230 R231 R232 R233 R234 R235 R236 R237 R238 R239 R240 R241 R242 R243 R244 R245 R246 R247 R248 R249 R250 R251 R252 R253 R254 R255 R256 R257 R258 R259 R260 R261 R262 R263 R264 R265 R266 S201 S202 S203 TP201 TP202 U201 U202 U203 X201 Y201
component class "0 Overview": FB1 FB2 FB3 M1 M2 M3 M4 M5 M6 M7 M8 M9 M10 M11 M12 M13 M14 M15 M16 M17 M18 M19 M20 M21 M22 M23
differential pair USB_D_TER: +USB_D_TER_P -USB_D_TER_N
differential pair USB_D: +USB_D_P -USB_D_N

## Components (designator, comment, footprint, x,y, rotation, side; value= is the part's Value field where it differs from the comment)
C101 "4.7u" STT--CC--0805 72.94,91.188 r90 top
C102 "4.7u" STT--CC--0805 95.735,88.182 r90 top
C103 "4.7u" STT--CC--0805 107.427,91.069 r180 top
C104 "10n" STT--CC--0603 104.208,92.724 r0 top
C105 "100p" STT--CC--0402 99.187,87.986 r90 top
C106 "10u" STT--CC--0603 94.358,85.7 r180 top
C107 "22u" STT--CC--0805 114.39,84.427 r180 top
C108 "22u" STT--CC--0805 89.851,89.902 r180 top
C109 "22u" STT--CC--0805 110.763,91.07 r0 top
C110 "1u" STT--CC--0603 35.376,58.842 r0 top
C111 "1u" STT--CC--0603 84.592,77.021 r90 top
C112 "1u" STT--CC--0603 112.883,28.424 r270 top
C113 "4.7u" STT--CC--0805 31.3,56.164 r270 top
C114 "4.7u" STT--CC--0805 77.859,76.683 r270 top
C115 "4.7u" STT--CC--0805 110.205,32.5 r180 top
C116 "1u" STT--CC--0603 29.522,56.036 r270 top
C117 "1u" STT--CC--0603 76.081,76.555 r270 top
C118 "1u" STT--CC--0603 110.077,34.278 r180 top
C119 "1u" STT--CC--0603 72.698,75.9 r90 top
C120 "1u" STT--CC--0603 88.603,73.528 r90 top
C121 "1u" STT--CC--0603 105.865,30.983 r0 top
C122 "4.7u" STT--CC--0805 108.16,38.411 r270 top
C123 "1u" STT--CC--0603 66.602,75.876 r270 top
C124 "1u" STT--CC--0603 82.507,73.504 r270 top
C125 "1u" STT--CC--0603 102.863,34.593 r90 top
C126 "4.7u" STT--CC--0805 108.16,41.735 r270 top
C127 "100n" STT--CC--0402 63.862,76.179 r270 top
C128 "100n" STT--CC--0402 79.767,73.807 r270 top
C129 "100n" STT--CC--0402 101.593,33.115 r90 top
C130 "100n" STT--CC--0402 106.186,40.295 r180 top
C131 "100n" STT--CC--0402 101.922,84.582 r90 top
C201 "15p" STT--CC--0402 28.194,83.878 r90 top
C202 "15p" STT--CC--0402 28.194,85.794 r270 top
C203 "100n" STT--CC--0402 54.589,81.675 r90 top
C204 "10n" STT--CC--0402 33.528,74.93 r180 top
C205 "4.7u" STT--CC--0402 43.12,81.834 r90 top
C206 "4.7u" STT--CC--0402 44.095,81.834 r90 top
C207 "4.7u" STT--CC--0402 43.516,77.842 r180 top
C208 "4.7u" STT--CC--0402 29.918,81.604 r0 top
C209 "100n" STT--CC--0402 36.641,91.752 r270 top
C210 "100n" STT--CC--0402 35.56,76.962 r0 top
C211 "100n" STT--CC--0402 29.66,86.106 r0 top
C212 "100n" STT--CC--0402 38.862,91.752 r270 top
C213 "100n" STT--CC--0402 29.66,87.63 r0 top
C214 "100n" STT--CC--0402 33.528,77.978 r180 top
C215 "100n" STT--CC--0402 34.798,91.752 r270 top
C216 "100n" STT--CC--0402 35.56,77.978 r0 top
C217 "100n" STT--CC--0402 41.656,77.978 r180 top
C218 "100n" STT--CC--0402 45.154,87.376 r180 top
C219 "100n" STT--CC--0402 45.154,88.392 r180 top
C222 "100n" STT--CC--0402 28.045,81.615 r0 top
C301 "100p" STT--CC--0402 71.882,84.311 r90 top
C302 "100p" STT--CC--0402 99.815,40.849 r90 top
C303 "100p" STT--CC--0402 72.898,84.311 r90 top
C304 "470p" STT--CC--0402 103.887,43.888 r90 top
C305 "100p" STT--CC--0402 108.255,44.971 r180 top
C306 "100n" STT--CC--0402 102.863,43.897 r270 top
C307 "100n" STT--CC--0402 108.255,49.289 r0 top
C308 "100n" STT--CC--0402 99.053,52.787 r90 top
C309 "100n" STT--CC--0402 105.911,43.897 r270 top
C310 "100n" STT--CC--0402 107.181,52.787 r90 top
C311 "100n" STT--CC--0402 100.069,52.787 r90 top
C312 "1u" STT--CC--0603 98.533,45.733 r0 top
C313 "1u" STT--CC--0603 98.533,49.797 r0 top
C314 "470p" STT--CC--0402 103.117,53.919 r90 top
C315 "100n" STT--CC--0402 101.085,52.787 r90 top
C316 "1u" STT--CC--0603 98.533,47.257 r0 top
C317 "180p" STT--CC--0402 110.171,49.289 r180 top
C318 "3.3n" STT--CC--0402 110.171,48.019 r180 top
C319 "100n" STT--CC--0402 106.165,52.787 r90 top
C320 "470p" STT--CC--0402 104.133,53.919 r90 top
C321 "18p" STT--CC--0402 110.171,51.067 r0 top
C322 "100n" STT--CC--0402 102.229,37.375 r90 top
C323 "100p" STT--CC--0402 77.978,84.311 r90 top
C324 "100p" STT--CC--0402 78.994,84.311 r90 top
C325 "100n" STT--CC--0402 102.047,63.674 r90 top
C326 "100p" STT--CC--0402 80.01,84.311 r90 top
C327 "100p" STT--CC--0402 81.026,84.311 r90 top
C328 "100n" STT--CC--0402 106.111,68.629 r270 top
C329 "470p" STT--CC--0402 90.042,68.906 r180 top
C330 "100p" STT--CC--0402 76.962,84.311 r90 top
C331 "100p" STT--CC--0402 99.815,43.897 r90 top
C401 "100p" STT--CC--0402 62.738,84.311 r90 top
C402 "100p" STT--CC--0402 63.754,84.311 r90 top
C403 "100p" STT--CC--0402 64.77,84.311 r90 top
C404 "100p" STT--CC--0402 65.786,84.311 r90 top
C405 "100p" STT--CC--0402 66.802,84.311 r90 top
C406 "100p" STT--CC--0402 67.818,84.311 r90 top
C407 "100p" STT--CC--0402 68.834,84.311 r90 top
C408 "100p" STT--CC--0402 69.85,84.311 r90 top
C409 "100p" STT--CC--0402 81.29,65.183 r0 top
C410 "100p" STT--CC--0402 81.094,62.585 r90 top
C411 "100p" STT--CC--0402 83.126,62.585 r90 top
C412 "100p" STT--CC--0402 85.158,62.585 r90 top
C413 "100p" STT--CC--0402 87.19,62.585 r90 top
C414 "100p" STT--CC--0402 89.222,62.585 r90 top
C415 "100p" STT--CC--0402 90.042,65.183 r180 top
C416 "100p" STT--CC--0402 81.29,67.215 r0 top
C417 "100n" STT--CC--0402 90.042,67.215 r0 top
C418 "470p" STT--CC--0402 81.59,68.906 r180 top
C419 "100p" STT--CC--0402 70.865,84.308 r90 top
C420 "100n" STT--CC--0402 77.701,66.42 r90 top
C421 "100p" STT--CC--0402 75.727,72.458 r180 top
C422 "100n" STT--CC--0402 74.653,66.42 r90 top
C423 "100p" STT--CC--0402 20.828,75.029 r90 top
C424 "100p" STT--CC--0402 19.812,75.029 r90 top
C425 "100n" STT--CC--0402 75.669,66.42 r90 top
C426 "470p" STT--CC--0402 71.547,68.906 r180 top
C427 "100p" STT--CC--0402 55.76,70.277 r0 top
C428 "100p" STT--CC--0402 55.76,73.325 r0 top
C429 "100n" STT--CC--0402 55.76,69.261 r0 top
C432 "100p" STT--CC--0402 57.501,60.397 r90 top
C433 "100p" STT--CC--0402 48.138,66.965 r90 top
C434 "100n" STT--CC--0402 50.17,66.965 r90 top
C435 "100n" STT--CC--0402 59.533,60.397 r90 top
C501 "470p" STT--CC--0402 63.516,64.085 r0 top
C502 "470p" STT--CC--0402 45.552,69.101 r270 top
C503 "100p" STT--CC--0402 30.988,75.029 r90 top
C504 "100p" STT--CC--0402 19.296,84.158 r0 top
C505 "100n" STT--CC--0402 67.906,57.022 r90 top
C506 "100n" STT--CC--0402 40.467,66.254 r0 top
C507 "100p" STT--CC--0402 29.972,75.029 r90 top
C508 "100p" STT--CC--0402 19.296,85.174 r0 top
C509 "100n" STT--CC--0402 44.961,56.835 r270 top
C510 "100p" STT--CC--0402 26.924,75.029 r90 top
C511 "100p" STT--CC--0402 28.956,75.029 r90 top
C512 "100p" STT--CC--0402 25.908,75.029 r90 top
C513 "100p" STT--CC--0402 27.94,75.029 r90 top
C514 "100n" STT--CC--0402 70.444,14.508 r90 top
C515 "100p" STT--CC--0402 22.86,75.029 r90 top
C516 "100p" STT--CC--0402 24.892,75.029 r90 top
C517 "100p" STT--CC--0402 21.844,75.029 r90 top
C518 "100p" STT--CC--0402 23.876,75.029 r90 top
C519 "100n" STT--CC--0402 83.872,27.881 r0 top
C520 "100n" STT--CC--0402 35.495,34.601 r180 top
C521 "470p" STT--CC--0402 31.678,51.099 r270 top
C522 "470p" STT--CC--0402 32.694,51.099 r270 top
C523 "100p" STT--CC--0402 32.382,43.421 r0 top
C524 "100p" STT--CC--0402 28.18,49.771 r0 top
C525 "100n" STT--CC--0402 36.192,45.707 r180 top
C526 "100n" STT--CC--0402 36.192,44.691 r180 top
C527 "100p" STT--CC--0402 33.528,75.946 r180 top
C528 "100p" STT--CC--0402 19.296,81.11 r0 top
C529 "100n" STT--CC--0402 28.18,44.691 r0 top
C530 "100n" STT--CC--0402 28.18,45.707 r0 top
C531 "10n" STT--CC--0402 30.466,43.421 r0 top
C532 "10n" STT--CC--0402 30.466,42.405 r0 top
C533 "470p" STT--CC--0402 46.272,51.481 r270 top
C534 "470p" STT--CC--0402 69.128,19.897 r270 top
C603 "100p" STT--CC--0402 19.296,83.142 r0 top
C604 "100p" STT--CC--0402 19.296,82.126 r0 top
C605 "100p" STT--CC--0402 100.897,14.501 r180 top
C606 "100p" STT--CC--0402 98.981,14.501 r0 top
C607 "100p" STT--CC--0402 28.897,14.489 r180 top
C608 "100p" STT--CC--0402 26.981,14.489 r0 top
C609 "100n" STT--CC--0402 102.48,14.039 r90 top
C610 "100n" STT--CC--0402 30.48,14.028 r90 top
C611 "470p" STT--CC--0402 111,9.929 r270 top
C612 "470p" STT--CC--0402 92.585,17.791 r180 top
C613 "470p" STT--CC--0402 39,9.917 r270 top
C614 "470p" STT--CC--0402 20.585,17.78 r180 top
D101 "SSA24-E3/61T" STT--SD--SMA-DO-214AC 109.227,83.602 r0 top
D201 "ESD9R3.3S" ONS--SD--SOD-923 27.374,91.44 r180 top
D202 "ESD9R3.3S" ONS--SD--SOD-923 24.442,91.44 r0 top
D203 "ESD9R3.3S" ONS--SD--SOD-923 61.664,88.392 r180 top
D204 "ESD9R3.3S" ONS--SD--SOD-923 60.002,88.392 r0 top
D205 "ESD9R3.3S" ONS--SD--SOD-923 32.004,77.47 r90 top
D206 "150060RS75000" STT--LD--0603-red 16.51,96.52 r180 top
D207 "150060GS75000" STT--LD--0603-green 16.51,94.996 r180 top
D208 "150060GS75000" STT--LD--0603-green 82.804,93.98 r0 top
D209 "150060GS75000" STT--LD--0603-green 65.532,6.846 r270 top
D210 "150060GS75000" STT--LD--0603-green 63.754,6.846 r270 top
D211 "150060GS75000" STT--LD--0603-green 58.166,6.846 r270 top
D212 "150060GS75000" STT--LD--0603-green 82.804,88.646 r0 top
D213 "150060GS75000" STT--LD--0603-green 82.804,92.202 r0 top
D214 "150060GS75000" STT--LD--0603-green 82.804,90.424 r0 top
D215 "150060GS75000" STT--LD--0603-green 56.388,6.846 r270 top
D216 "SESD0402X1BN-0010-098" LF--SD--0402R 67.032,92.896 r0 top
D601 "SESD0402X1BN-0010-098" LF--SD--0402R 110.675,8.139 r270 top
D602 "SESD0402X1BN-0010-098" LF--SD--0402R 90.796,17.466 r0 top
D603 "SESD0402X1BN-0010-098" LF--SD--0402R 38.675,8.128 r270 top
D604 "SESD0402X1BN-0010-098" LF--SD--0402R 18.796,17.455 r0 top
FB1 "STTNumber" STT--DO--STT-Number 6.35,51.186 r270 top
FB2 "Logo STT NG Tiny" STT--DO--Logo-New 6.35,79.634 r270 top
FB3 "SN:" STT--DO--SN 6.35,60.838 r270 top
FL301 "LP0805A3500AWTR" KA--LP0805A 98.935,66.166 r90 top
FL302 "LP0603A1747ANTR" KA--LP0603A 108.537,66.175 r270 top
FL303 "LP0603A0947ANTR" KA--LP0603A 111.396,66.175 r270 top
FL501 "SEDC-10-63+" MC--SEDC-10-63+ 60.242,35.64 r0 top
J201 "Type C f" MOL--CO--2171790001 61,94.813 r180 top locked
J202 "SM03B-SRSS-TB" JST--CO--SM03B-SRSS-TB 25.908,98.044 r180 top
J601 "SMA f" STT--CO--142-0701-871 111,0 r270 top locked
J602 "BNC jack" SAM--CO--BNC7T-J-P-GN-RA-BM1D 85,0 r180 top locked
J603 "SMA f" STT--CO--142-0701-871 39,0 r270 top locked
J604 "BNC jack" SAM--CO--BNC7T-J-P-GN-RA-BM1D 13,0 r180 top locked
L101 "2.2u" BOU--LF--SRP4020FA 108.074,87.736 r270 top
L102 "470n" MUR--FB--DFE252012F 91.454,86.862 r270 top
L103 "2.2u" BOU--LF--SRP4020FA 87.65,86.59 r90 top
L104 "2.2u" BOU--LF--SRP4020FA 112.628,87.736 r90 top
L105 "33E" STT--FB--0402 30.342,54.016 r180 top
L106 "33E" STT--FB--0402 76.901,74.535 r180 top
L107 "33E" STT--FB--0402 108.057,33.458 r90 top
L108 "33E" STT--FB--0402 64.878,76.179 r270 top
L109 "33E" STT--FB--0402 80.783,73.807 r270 top
L110 "33E" STT--FB--0402 101.593,35.031 r270 top
L111 "33E" STT--FB--0402 106.186,41.311 r180 top
L201 "33E" STT--FB--0402 55.489,83.51 r270 top
L202 "33E" STT--FB--0402 44.982,78.408 r90 top
L203 "3.3u" ABR--LF--0806 46.052,81.834 r270 top
L205 "33E" STT--FB--0402 26.204,81.609 r180 top
L301 "33E" STT--FB--0402 101.847,43.897 r90 top
L302 "33E" STT--FB--0402 108.197,52.787 r270 top
L303 "33E" STT--FB--0402 98.037,52.787 r270 top
L304 "33E" STT--FB--0402 103.245,37.375 r270 top
L305 "33E" STT--FB--0402 102.047,65.59 r270 top
L306 "33E" STT--FB--0402 106.111,66.713 r90 top
L401 "33E" STT--FB--0402 90.042,66.199 r180 top
L402 "33E" STT--FB--0402 78.717,66.42 r90 top
L403 "100nH" STT--RC--0603 73.375,68.156 r270 top
L404 "33E" STT--FB--0402 76.685,66.42 r90 top
L405 "33E" STT--FB--0402 55.76,68.245 r0 top
L406 "33E" STT--FB--0402 51.186,66.965 r90 top
L407 "33E" STT--FB--0402 60.549,60.397 r90 top
L501 "33E" STT--FB--0402 68.922,57.022 r90 top
L502 "33E" STT--FB--0402 40.467,65.238 r0 top
L503 "33E" STT--FB--0402 43.945,56.835 r270 top
L504 "33E" STT--FB--0402 71.46,14.508 r90 top
L505 "33E" STT--FB--0402 83.872,26.865 r0 top
L506 "33E" STT--FB--0402 35.495,35.617 r180 top
L507 "33E" STT--FB--0402 36.192,43.675 r180 top
L508 "33E" STT--FB--0402 28.18,43.675 r0 top
L601 "33E" STT--FB--0402 103.496,14.039 r90 top
L602 "33E" STT--FB--0402 31.496,14.028 r90 top
M1 "2.4 mm" STT--DO--Hole-2.4-3.0#1 119.25,2.75 r0 top
M2 "2.4 mm" STT--DO--Hole-2.4-3.0#1 2.75,95.239 r0 top
M3 "2.4 mm" STT--DO--Hole-2.4-3.0#1 119.25,23.75 r0 top
M4 "2.4 mm" STT--DO--Hole-2.4-3.0#1 73.25,2.75 r0 top
M5 "2.4 mm" STT--DO--Hole-2.4-3.0#2 0,0 r0 top
M6 "2.4 mm" STT--DO--Hole-2.4-3.0#1 119.25,77.75 r0 top
M7 "2.4 mm" STT--DO--Hole-2.4-3.0#1 76.5,95.25 r0 top
M8 "2.4 mm" STT--DO--Hole-2.4-3.0#1 48.75,2.75 r0 top
M9 "2.4 mm" STT--DO--Hole-2.4-3.0#1 119.25,95.25 r0 top
M10 "2.4 mm" STT--DO--Hole-2.4-3.0#1 119.25,57.25 r0 top
M11 "2.4 mm" STT--DO--Hole-2.4-3.0#1 2.75,23.75 r0 top
M12 "2.4 mm" STT--DO--Hole-2.4-3.0#1 94.5,77 r0 top
M13 "2.4 mm" STT--DO--Hole-2.4-3.0#1 92.5,35.5 r0 top
M14 "2.4 mm" STT--DO--Hole-2.4-3.0#1 39,38.25 r0 top
M15 "2.4 mm" STT--DO--Hole-2.4-3.0#1 16.5,49.25 r0 top
M16 "2.4 mm" STT--DO--Hole-2.4-3.0#1 91.835,23.063 r0 top
M17 "2.4 mm" STT--DO--Hole-2.4-3.0#1 94.5,57.25 r0 top
M18 "2.4 mm" STT--DO--Hole-2.4-3.0#1 53.002,60.786 r0 top
M19 "2.4 mm" STT--DO--Hole-2.4-3.0#1 22.86,68.102 r0 top
M20 "2.4 mm" STT--DO--Hole-2.4-3.0#1 41.532,50.984 r0 top
M21 "2.4 mm" STT--DO--Hole-2.4-3.0#1 85.75,56.25 r0 top
M22 "2.4 mm" STT--DO--Hole-2.4-3.0#1 39.33,26.526 r0 top
M23 "2.4 mm" STT--DO--Hole-2.4-3.0#1 78.615,22.598 r0 top
Q201 "DMP6050SFG" DIO--TR--POWERDI3333-8 69.78,91.917 r180 top
Q202 "BSS84AK,215" ONS--IC--SOT-23 61.214,8.624 r180 top value=BSS84AK
Q203 "BSS84AK,215" ONS--IC--SOT-23 53.848,8.624 r180 top value=BSS84AK
R101 "249k" STT--RC--0603 93.264,89.698 r180 top
R102 "620E" STT--RC--0603 104.967,90.545 r270 top
R103 "10k" STT--RC--0603 100.437,84.827 r90 top
R104 "38.3k" STT--RC--0603 100.437,87.686 r90 top
R105 "10k" STT--RC--0603 103.391,90.536 r270 top
R106 "4.7k" STT--RC--0603 101.194,89.883 r180 top
R107 "0E" STT--RC--0603 86.764,89.652 r180 top
R108 "0E" STT--RC--0603 113.865,90.819 r0 top
R109 "0E" STT--RC--0603 27.998,56.036 r270 top
R110 "0E" STT--RC--0603 74.557,76.555 r270 top
R111 "0E" STT--RC--0603 110.077,35.802 r180 top
R112 "0E" STT--RC--0603 64.304,74.364 r0 top
R113 "0E" STT--RC--0603 80.209,71.992 r0 top
R114 "0E" STT--RC--0603 100.323,34.569 r90 top
R115 "0E" STT--RC--0603 106.128,38.275 r270 top
R201 "1k" STT--RC--0402 44.508,92.71 r0 top
R202 "1k" STT--RC--0402 51.758,92.71 r180 top
R203 "1k" STT--RC--0402 29.21,83.878 r90 top
R204 "10k" STT--RC--0402 72.94,93.375 r180 top
R205 "5.1k" STT--RC--0402 62.7,89.524 r180 top
R206 "10k" STT--RC--0402 54.591,83.51 r270 top
R207 "5.1k" STT--RC--0402 58.8,89.521 r0 top
R208 "33E" STT--RC--0402 43.516,78.858 r180 top
R209 "71.5E" STT--RC--0402 80.322,92.202 r180 top
R210 "100E" STT--RC--0402 21.394,81.11 r0 top
R211 "100E" STT--RC--0402 33.528,76.962 r0 top
R212 "100E" STT--RC--0402 81.026,86.227 r90 top
R213 "100E" STT--RC--0402 80.01,86.227 r90 top
R214 "100E" STT--RC--0402 78.994,86.227 r90 top
R215 "100E" STT--RC--0402 77.978,86.227 r90 top
R216 "100E" STT--RC--0402 76.962,86.227 r90 top
R217 "100E" STT--RC--0402 75.946,86.227 r90 top
R218 "100E" STT--RC--0402 74.93,86.227 r90 top
R219 "100E" STT--RC--0402 73.914,86.227 r90 top
R220 "100E" STT--RC--0402 72.898,86.227 r90 top
R221 "100E" STT--RC--0402 71.882,86.227 r90 top
R222 "200E" STT--RC--0402 23.876,89.662 r0 top
R223 "71.5E" STT--RC--0402 23.878,88.496 r0 top
R224 "71.5E" STT--RC--0402 80.322,93.98 r180 top
R225 "71.5E" STT--RC--0402 65.532,9.328 r90 top
R226 "71.5E" STT--RC--0402 63.754,9.386 r90 top
R227 "71.5E" STT--RC--0402 58.166,9.328 r90 top
R228 "10k" STT--RC--0402 22.606,87.122 r270 top
R229 "4.7k" STT--RC--0402 28.569,80.035 r90 top
R230 "4.7k" STT--RC--0402 29.51,80.035 r90 top
R231 "100E" STT--RC--0402 69.85,86.227 r270 top
R232 "100E" STT--RC--0402 68.834,86.227 r270 top
R233 "100E" STT--RC--0402 67.818,86.227 r270 top
R234 "100E" STT--RC--0402 66.802,86.227 r270 top
R235 "100E" STT--RC--0402 65.786,86.227 r270 top
R236 "100E" STT--RC--0402 64.77,86.227 r270 top
R237 "100E" STT--RC--0402 63.754,86.227 r270 top
R238 "100E" STT--RC--0402 62.738,86.227 r270 top
R239 "100E" STT--RC--0402 19.812,77.199 r270 top
R240 "100E" STT--RC--0402 20.828,77.199 r270 top
R241 "100E" STT--RC--0402 70.865,86.239 r270 top
R242 "100E" STT--RC--0402 21.844,77.199 r270 top
R243 "100E" STT--RC--0402 22.86,77.199 r270 top
R244 "100E" STT--RC--0402 23.876,77.199 r270 top
R245 "100E" STT--RC--0402 24.892,77.199 r270 top
R246 "100E" STT--RC--0402 25.908,77.199 r270 top
R247 "100E" STT--RC--0402 26.924,77.199 r270 top
R248 "100E" STT--RC--0402 27.94,77.199 r270 top
R249 "100E" STT--RC--0402 28.956,77.199 r270 top
R250 "100E" STT--RC--0402 29.972,77.199 r270 top
R251 "100E" STT--RC--0402 30.988,77.199 r270 top
R252 "100E" STT--RC--0402 21.394,85.174 r180 top
R253 "100E" STT--RC--0402 21.394,84.158 r180 top
R254 "100E" STT--RC--0402 21.394,83.142 r180 top
R255 "100E" STT--RC--0402 21.394,82.126 r180 top
R256 "27E" STT--RC--0402 45.192,84.839 r0 top
R257 "27E" STT--RC--0402 45.192,85.826 r0 top
R258 "71.5E" STT--RC--0402 80.322,88.646 r180 top
R259 "71.5E" STT--RC--0402 80.322,90.424 r180 top
R260 "1k" STT--RC--0402 62.23,5.888 r90 top
R261 "10k" STT--RC--0402 61.214,5.888 r270 top
R262 "71.5E" STT--RC--0402 56.388,9.328 r90 top
R263 "1k" STT--RC--0402 54.864,5.888 r90 top
R264 "10k" STT--RC--0402 53.848,5.888 r270 top
R265 "100E" STT--RC--0402 25.729,89.653 r0 top
R266 "100E" STT--RC--0402 27.552,89.655 r0 top
R301 "10k" STT--RC--0402 100.831,40.849 r270 top
R302 "10k" STT--RC--0402 100.831,43.897 r270 top
R303 "10k" STT--RC--0402 110.171,45.987 r0 top
R304 "10k" STT--RC--0402 108.255,45.987 r0 top
R305 "5.1k" STT--RC--0402 98.995,48.527 r0 top
R306 "49.9E" STT--RC--0402 104.583,52.337 r0 top
R307 "49.9E" STT--RC--0402 102.667,52.337 r180 top
R308 "49.9E" STT--RC--0402 101.651,54.369 r0 top
R309 "1.8k" STT--RC--0402 108.255,51.067 r0 top
R310 "82E" STT--RC--0402 108.255,48.019 r0 top
R311 "330E" STT--RC--0402 108.255,47.003 r0 top
R312 "10k" STT--RC--0402 104.079,63.674 r270 top
R313 "10k" STT--RC--0402 105.095,63.674 r270 top
R314 "100E" STT--RC--0402 104.895,43.897 r90 top
R315 "10k" STT--RC--0402 103.063,63.674 r90 top
R316 "10k" STT--RC--0402 106.111,63.674 r90 top
R317 "10k" STT--RC--0402 104.079,68.629 r90 top
R318 "10k" STT--RC--0402 103.063,68.629 r90 top
R319 "10k" STT--RC--0402 105.095,68.629 r270 top
R320 "10k" STT--RC--0402 102.047,68.629 r270 top
R401 "10k" STT--RC--0402 81.29,64.167 r180 top
R402 "10k" STT--RC--0402 82.11,62.585 r270 top
R403 "10k" STT--RC--0402 84.142,62.585 r270 top
R404 "10k" STT--RC--0402 86.174,62.585 r270 top
R405 "10k" STT--RC--0402 88.206,62.585 r270 top
R406 "10k" STT--RC--0402 90.238,62.585 r270 top
R407 "10k" STT--RC--0402 90.042,64.167 r0 top
R408 "10k" STT--RC--0402 81.29,66.199 r180 top
R409 "10k" STT--RC--0402 75.727,71.442 r180 top
R410 "10k" STT--RC--0402 55.76,71.293 r180 top
R411 "10k" STT--RC--0402 55.76,72.309 r180 top
R412 "10k" STT--RC--0402 58.517,60.397 r270 top
R413 "10k" STT--RC--0402 49.165,66.955 r270 top
R501 "10k" STT--RC--0402 65.874,57.022 r90 top
R502 "10k" STT--RC--0402 64.858,57.022 r90 top
R503 "10k" STT--RC--0402 40.467,68.286 r0 top
R504 "10k" STT--RC--0402 40.467,69.302 r0 top
R505 "10k" STT--RC--0402 66.89,57.022 r270 top
R506 "10k" STT--RC--0402 40.467,67.27 r180 top
R507 "10k" STT--RC--0402 63.842,57.022 r270 top
R508 "10k" STT--RC--0402 40.467,70.318 r180 top
R509 "49.9E" STT--RC--0402 69.807,59.92 r143 top
R510 "49.9E" STT--RC--0402 44.418,65.657 r180 top
R511 "10k" STT--RC--0402 68.412,14.508 r90 top
R512 "10k" STT--RC--0402 67.396,14.508 r90 top
R513 "10k" STT--RC--0402 46.993,56.835 r270 top
R514 "10k" STT--RC--0402 48.009,56.835 r270 top
R515 "15.4E" STT--RC--0402 84.617,45.031 r270 top
R516 "15.4E" STT--RC--0402 26.458,34.962 r180 top
R517 "10k" STT--RC--0402 69.428,14.508 r270 top
R518 "10k" STT--RC--0402 45.977,56.835 r90 top
R519 "71.5E" STT--RC--0402 86.083,44.073 r180 top
R520 "71.5E" STT--RC--0402 27.416,33.496 r90 top
R521 "10k" STT--RC--0402 66.38,14.508 r270 top
R522 "10k" STT--RC--0402 49.025,56.835 r90 top
R523 "15.4E" STT--RC--0402 84.617,43.115 r270 top
R524 "15.4E" STT--RC--0402 28.374,34.962 r180 top
R525 "10k" STT--RC--0402 83.872,28.897 r0 top
R526 "10k" STT--RC--0402 83.872,31.945 r0 top
R527 "10k" STT--RC--0402 35.495,33.585 r180 top
R528 "10k" STT--RC--0402 35.495,30.537 r180 top
R529 "49.9E" STT--RC--0402 87.694,27.313 r180 top
R530 "49.9E" STT--RC--0402 31.673,30.988 r0 top
R531 "10k" STT--RC--0402 83.872,29.913 r180 top
R532 "10k" STT--RC--0402 35.495,32.569 r0 top
R533 "10k" STT--RC--0402 83.872,30.929 r180 top
R534 "10k" STT--RC--0402 35.495,31.553 r0 top
R535 "52.3E" STT--RC--0402 32.186,52.565 r0 top
R536 "10k" STT--RC--0402 28.18,48.755 r0 top
R537 "1k" STT--RC--0402 32.382,42.405 r180 top
R538 "1k" STT--RC--0402 28.18,47.739 r180 top
R539 "499E" STT--RC--0402 36.192,46.723 r0 top
R601 "10k" STT--RC--0402 100.897,13.485 r0 top
R602 "10k" STT--RC--0402 98.981,13.485 r180 top
R603 "10k" STT--RC--0402 28.897,13.503 r0 top
R604 "10k" STT--RC--0402 26.981,13.499 r180 top
R605 "86.6E" STT--RC--0402 95.887,17.341 r270 top
R606 "86.6E" STT--RC--0402 23.887,17.33 r270 top
R607 "43.2E" STT--RC--0402 94.465,17.792 r0 top
R608 "43.2E" STT--RC--0402 22.465,17.78 r0 top
S201 "PTS845" CAK--PB--PTS485 44.958,95.758 r270 top
S202 "PTS845" CAK--PB--PTS485 51.308,95.758 r270 top
S203 "FSMRA4JH" TEC--PB--1-1825027-1 16.51,93.98 r90 top locked
TP101 "0.5 mm" STT--DO--TP-0.5 87.969,90.934 r90 top
TP102 "0.5 mm" STT--DO--TP-0.5 113,92.095 r90 top
TP103 "0.5 mm" STT--DO--TP-0.5 27.988,57.952 r90 top
TP104 "0.5 mm" STT--DO--TP-0.5 74.547,78.471 r90 top
TP105 "0.5 mm" STT--DO--TP-0.5 111.993,35.813 r0 top
TP106 "0.5 mm" STT--DO--TP-0.5 62.749,75.758 r90 top
TP107 "0.5 mm" STT--DO--TP-0.5 78.655,73.385 r90 top
TP108 "0.5 mm" STT--DO--TP-0.5 100.331,32.665 r270 top
TP109 "0.5 mm" STT--DO--TP-0.5 106.628,42.424 r90 top
TP201 "0.5 mm" STT--DO--TP-0.5 71.314,89.725 r90 top
TP202 "0.5 mm" STT--DO--TP-0.5 47.641,82.828 r0 top
TP301 "0.5 mm" STT--DO--TP-0.5 103.879,42.177 r180 top
U101 "TPS62802YKA" TEI--IC--BGA6 93.777,87.411 r180 top
U102 "MIC2253-06YML" MC--IC--SON50P300X300X90-13N-D 103.591,87.327 r0 top
U103 "LDL212PU50R" STM--IC--DFN-6 34.602,56.302 r0 top
U104 "LDL212PU50R" STM--IC--DFN-6 81.161,76.821 r0 top
U105 "LDL212PU50R" STM--IC--DFN-6 110.343,29.198 r270 top
U106 "AP2114H-3.3TRG1" DI--IC--SOT-223-3 113.496,40.295 r0 top
U107 "NCP702SN33T1G" ON--IC--SOT-23-5 69.63,75.822 r180 top
U108 "NCP702SN33T1G" ON--IC--SOT-23-5 85.535,73.45 r180 top
U109 "NCP702SN33T1G" ON--IC--SOT-23-5 105.657,34.053 r90 top
U201 "W25Q128JVSIQ TR" WIB--IC--SOIC8 51.112,85.675 r270 top
U202 "SC1510(13)-A4" IC--RASPI--QFN-80 36.641,84.835 r270 top locked
U203 "24AA32A-I/MC" MIC--IC--QFN50P200X300X100_HS-9N-8 25.771,79.835 r270 top value=24AA32A
U301 "MAX2871ETJ+T" AD-IC-MAX2871ETJ+T 103.637,48.332 r180 top value="23.5MHz to 6000MHz"
U302 "LMK6CE10000CDLFR" TXI-IC-LMK6CE10000CDLFR 103.054,40.157 r90 top value="100 MHz"
U303 "RFSW6042TR7" QV--IC--QFN-12 104.333,61.076 r270 top
U304 "RFSW6042TR7" QV--IC--QFN-12 103.825,71.227 r90 top
U401 "HMC1119LP4ME" ADI--IC--LFCSP-24 85.666,68.156 r180 top
U402 "TRF37A73IDSGR" TI--IC--WSON-8 76.431,69.156 r180 top
U403 "QPC6324TR13" QV--IC--QFN-20 59.512,70.653 r90 top
U404 "QPC6324TR13" QV--IC--QFN-20 49.154,70.653 r180 top
U405 "QPC6324TR13" QV--IC--QFN-20 59.512,64.085 r180 top
U501 "RFSW6042TR7" QV--IC--QFN-12 66.395,59.59 r90 top
U502 "RFSW6042TR7" QV--IC--QFN-12 43.036,67.766 r0 top
U503 "RFSW6042TR7" QV--IC--QFN-12 46.472,54.267 r270 top
U504 "RFSW6042TR7" QV--IC--QFN-12 68.932,17.077 r90 top
U505 "RFSW6042TR7" QV--IC--QFN-12 86.417,29.396 r0 top
U506 "RFSW6042TR7" QV--IC--QFN-12 32.949,33.086 r180 top
U507 "AD8318SCPZ-EP-RL7" ADI--AD8318SCPZ-EP-RL7 32.186,46.977 r0 top
U601 "QPC6324TR13" QV--IC--QFN-20 100.824,17.792 r180 top
U602 "QPC6324TR13" QV--IC--QFN-20 28.824,17.78 r180 top
Y201 "ABM8-272-T3" ABR--CR--ABM8 25.795,85.224 r270 top

## Footprints (in the part's own frame and the unit in brackets; to place one, negate y for a bottom-side part, rotate by r counter-clockwise, add the part's x,y. Pads: shape width x height; smd on the part's side, far side on the other; paste and mask are expansions set on the pad)
ABR--CR--ABM8 [mm]
  rect 1.3x1.05 smd: 1(-1.15,-0.875) 2(1.15,-0.875) 3(1.15,0.875) 4(-1.15,0.875)
  silkscreen extent -1.2,-1.9 0.2,1.25, body extent -1.6,-1.25 1.6,1.25, height 0.75
ABR--LF--0806 [mm]
  rect 1x1.6 smd: 1(-1,0) 2(1,0)
  silkscreen extent -2.1,-0.8 0,0.8, body extent -1,-0.8 1,0.8, height 1
AD-IC-MAX2871ETJ+T [mm]
  rect 0.85x0.3 smd: 1(-2.45,1.75) 2(-2.45,1.25) 3(-2.45,0.75) 4(-2.45,0.25) 5(-2.45,-0.25) 6(-2.45,-0.75) 7(-2.45,-1.25) 8(-2.45,-1.75) 17(2.45,-1.75) 18(2.45,-1.25) 19(2.45,-0.75) 20(2.45,-0.25) 21(2.45,0.25) 22(2.45,0.75) 23(2.45,1.25) 24(2.45,1.75)
  rect 0.3x0.85 smd: 9(-1.75,-2.45) 10(-1.25,-2.45) 11(-0.75,-2.45) 12(-0.25,-2.45) 13(0.25,-2.45) 14(0.75,-2.45) 15(1.25,-2.45) 16(1.75,-2.45) 25(1.75,2.45) 26(1.25,2.45) 27(0.75,2.45) 28(0.25,2.45) 29(-0.25,2.45) 30(-0.75,2.45) 31(-1.25,2.45) 32(-1.75,2.45)
  rect 3.2x3.2 smd: 33(0,0)
  silkscreen extent -3,2.38 -2.75,2.62, body extent -2.55,-2.55 2.55,2.55, height 0.8
ADI--AD8318SCPZ-EP-RL7 [mm]
  rect 0.85x0.35 smd: 1(-1.95,0.975) 2(-1.95,0.325) 3(-1.95,-0.325) 4(-1.95,-0.975) 9(1.95,-0.975) 10(1.95,-0.325) 11(1.95,0.325) 12(1.95,0.975)
  rect 0.35x0.85 smd: 5(-0.975,-1.95) 6(-0.325,-1.95) 7(0.325,-1.95) 8(0.975,-1.95) 13(0.975,1.95) 14(0.325,1.95) 15(-0.325,1.95) 16(-0.975,1.95)
  rect 2.7x2.7 smd: 17(0,0)
  silkscreen extent -2.54,1.79 -2.21,2.11, body extent -2.05,-2.05 2.05,2.05, height 0.8
ADI--IC--LFCSP-24 [mm]
  rect 0.75x0.3 smd: 1(-2,1.25) 2(-2,0.75) 3(-2,0.25) 4(-2,-0.25) 5(-2,-0.75) 6(-2,-1.25) 13(2,-1.25) 14(2,-0.75) 15(2,-0.25) 16(2,0.25) 17(2,0.75) 18(2,1.25)
  rect 0.3x0.75 smd: 7(-1.25,-2) 8(-0.75,-2) 9(-0.25,-2) 10(0.25,-2) 11(0.75,-2) 12(1.25,-2) 19(1.25,2) 20(0.75,2) 21(0.25,2) 22(-0.25,2) 23(-0.75,2) 24(-1.25,2)
  rect 2.85x2.85 smd: 25(0,0)
  silkscreen extent -2.5,1.88 -2.25,2.12, body extent -2.05,-2.05 2.05,2.05, height 0.95
BOU--LF--SRP4020FA [mm]
  rect 1.35x3.8 smd: 1(-1.375,0) 2(1.375,0)
  silkscreen extent -2.05,-2.05 2.05,2.05, body extent -2.05,-2.05 2.05,2.05, height 1.87
CAK--PB--PTS485 [mm]
  rect 0.9x0.925 smd: 0(-1.05,1.8) 0(-1.05,-1.8)
  round 0.9 hole 0.9 unplated: 0(0.15,2.2) 0(0.15,-2.2)
  rect 1.8x0.75 smd: 1(1.05,-1.2) 3(1.05,1.2)
  rect 1.8x0.6 smd: 2(1.05,0)
  silkscreen extent -1.95,-3 2.35,3, body extent -1.95,-2.25 1.6,2.25, height 3.35
DI--IC--SOT-223-3 [mm]
  rect 1.9x0.9 smd: 1(-3.05,2.3) 2(-3.05,0) 3(-3.05,-2.3)
  rect 1.9x3.2 smd: 4(3.05,0)
  silkscreen extent -4,3.1 -2.1,3.1, body extent -3.5,-3.25 3.5,3.25, height 1.8
DIO--TR--POWERDI3333-8 [mm] "PowerDI 3333-8, 8-Pads, Body 3.35x3.35mm (max), IPC Low Density"
  rect 0.7x0.42 smd: 1(-1.5,0.975) 2(-1.5,0.325) 3(-1.5,-0.325) 4(-1.5,-0.975)
  rect 0.54x0.42 smd: 5(1.58,-0.975) 6(1.58,-0.325) 7(1.58,0.325) 8(1.58,0.975)
  L1 Top Layer region: 1.85,0.765 1.31,0.765 1.31,0.535 1.85,0.535 1.85,0.115 1.31,0.115 1.31,-0.115 1.85,-0.115 1.85,-0.535 1.31,-0.535 1.31,-0.765 1.85,-0.765 1.85,-1.185 -0.4,-1.185 -0.4,1.185 1.85,1.185
  silkscreen extent -2.5,-1.65 1.65,1.65, body extent -1.65,-1.65 1.65,1.65, height 0.9
IC--RASPI--QFN-80 [mm]
  rect 0.85x0.2 smd: 1(-4.95,3.8) 2(-4.95,3.4) 3(-4.95,3) 4(-4.95,2.6) 5(-4.95,2.2) 6(-4.95,1.8) 7(-4.95,1.4) 8(-4.95,1) 9(-4.95,0.6) 10(-4.95,0.2) 11(-4.95,-0.2) 12(-4.95,-0.6) 13(-4.95,-1) 14(-4.95,-1.4) 15(-4.95,-1.8) 16(-4.95,-2.2) 17(-4.95,-2.6) 18(-4.95,-3) 19(-4.95,-3.4) 20(-4.95,-3.8) 41(4.95,-3.8) 42(4.95,-3.4) 43(4.95,-3) 44(4.95,-2.6) 45(4.95,-2.2) 46(4.95,-1.8) 47(4.95,-1.4) 48(4.95,-1) 49(4.95,-0.6) 50(4.95,-0.2) 51(4.95,0.2) 52(4.95,0.6) 53(4.95,1) 54(4.95,1.4) 55(4.95,1.8) 56(4.95,2.2) 57(4.95,2.6) 58(4.95,3) 59(4.95,3.4) 60(4.95,3.8)
  rect 0.2x0.85 smd: 21(-3.8,-4.95) 22(-3.4,-4.95) 23(-3,-4.95) 24(-2.6,-4.95) 25(-2.2,-4.95) 26(-1.8,-4.95) 27(-1.4,-4.95) 28(-1,-4.95) 29(-0.6,-4.95) 30(-0.2,-4.95) 31(0.2,-4.95) 32(0.6,-4.95) 33(1,-4.95) 34(1.4,-4.95) 35(1.8,-4.95) 36(2.2,-4.95) 37(2.6,-4.95) 38(3,-4.95) 39(3.4,-4.95) 40(3.8,-4.95) 61(3.8,4.95) 62(3.4,4.95) 63(3,4.95) 64(2.6,4.95) 65(2.2,4.95) 66(1.8,4.95) 67(1.4,4.95) 68(1,4.95) 69(0.6,4.95) 70(0.2,4.95) 71(-0.2,4.95) 72(-0.6,4.95) 73(-1,4.95) 74(-1.4,4.95) 75(-1.8,4.95) 76(-2.2,4.95) 77(-2.6,4.95) 78(-3,4.95) 79(-3.4,4.95) 80(-3.8,4.95)
  rect 3.45x3.45 smd: 81(0,0)
  silkscreen extent -5.47,4.3 -5.28,4.5, body extent -5.05,-5.05 5.05,5.05, height 0.9
JST--CO--SM03B-SRSS-TB [mm]
  rect 0.6x1.55 smd: 1(-0.995,4.969) 2(0.005,4.969) 3(1.005,4.969)
  rect 1.2x1.8 smd: MP1(-2.295,1.093) MP2(2.305,1.093)
  silkscreen extent -2.49,0.04 2.51,4.29, body extent -2.49,0.11 2.51,5.06, height 2.96
KA--LP0603A [mm]
  rect 0.5x0.4 smd: 1(-0.625,0.35) 2(0.625,0.35) 3(0.625,-0.35) 4(-0.625,-0.35)
  silkscreen extent -0.67,1 -0.58,1.1, body extent -0.8,-0.42 0.8,0.42, height 0.6
KA--LP0805A [mm]
  rect 0.865x0.8 smd: 1(-0.732,-0.725) 2(0.732,-0.725) 3(0.732,0.725) 4(-0.732,0.725)
  silkscreen extent -1.01,-1.7 1,0.1, body extent -1.08,-1.04 1.08,1.04, height 1.1
LF--SD--0402R [mm]
  rect 0.6x0.35 smd: 1(0,-0.325) 2(0,0.325)
  body extent -0.3,-0.5 0.3,0.5, height 0.38
MC--IC--SON50P300X300X90-13N-D [mm]
  rect 0.8x0.25 smd: 1(-1.5,1.25) 2(-1.5,0.75) 3(-1.5,0.25) 4(-1.5,-0.25) 5(-1.5,-0.75) 6(-1.5,-1.25) 7(1.5,-1.25) 8(1.5,-0.75) 9(1.5,-0.25) 10(1.5,0.25) 11(1.5,0.75) 12(1.5,1.25)
  rect 1.75x2.45 smd: 13(0,0)
  silkscreen extent -2.02,1.75 -1.77,2, body extent -1.55,-1.5 1.55,1.5, height 0.9
MC--SEDC-10-63+ [mm]
  rect 1.65x1.52 smd: 1(-13.97,-11.56) 2(-11.43,-11.56) 3(-8.89,-11.56) 4(-6.35,-11.56) 5(-3.81,-11.56) 6(-1.27,-11.56) 7(1.27,-11.56) 8(3.81,-11.56) 9(6.35,-11.56) 10(8.89,-11.56) 11(11.43,-11.56) 12(13.97,-11.56) 13(13.97,11.56) 14(11.43,11.56) 15(8.89,11.56) 16(6.35,11.56) 17(3.81,11.56) 18(1.27,11.56) 19(-1.27,11.56) 20(-3.81,11.56) 21(-6.35,11.56) 22(-8.89,11.56) 23(-11.43,11.56) 24(-13.97,11.56)
  rect 29.59x14.48 smd: 25(0,0)
  silkscreen extent -16,-12.8 16,11.5, body extent -16,-12.17 16,12.17, height 10.01
MIC--IC--QFN50P200X300X100_HS-9N-8 [mm] "QFN, 8-Leads, Body 2.00x3.00mm, Pitch 0.50mm, Thermal Pad 1.55x1.75mm, IPC Medium Density"
  rect 1.55x1.75 smd: 0(0,0)
  rect 0.3x0.85 smd: 1(-0.75,-1.5) 2(-0.25,-1.5) 3(0.25,-1.5) 4(0.75,-1.5) 5(0.75,1.5) 6(0.25,1.5) 7(-0.25,1.5) 8(-0.75,1.5)
  silkscreen extent -1,-1.9 1,1.9, body extent -1,-1.5 1,1.5, height 1
MOL--CO--2171790001 [mm]
  rect 0.59x1.15 smd mask+0.064: A1B12(-3.2,3.425) A4B9(-2.4,3.425) B1A12(3.2,3.425) B4A9(2.4,3.425)
  rect 0.298x1.15 smd mask+0.064: A5(-1.25,3.425) A6(-0.25,3.425) A7(0.25,3.425) A8(1.25,3.425) B5(1.75,3.425) B6(0.75,3.425) B7(-0.75,3.425) B8(-1.75,3.425)
  oval 1x2.2 hole 0.6 slot 1.8 at 90 deg paste+0 mask+0.064: SH1(-4.32,-1.15) SH2(4.32,-1.15)
  oval 1x1.8 hole 0.6 slot 1.4 at 90 deg paste+0 mask+0.064: SH3(-4.32,2.85) SH4(4.32,2.85)
  silkscreen extent -5.21,-3.68 5.21,4.45, body extent -4.47,-3.25 4.47,3.5, height 3.27
MUR--FB--DFE252012F [mm]
  rect 1.2x2.4 smd: 1(-1.15,0) 2(1.15,0)
  silkscreen extent -1.75,-1.2 1.75,1.2, body extent -1.35,-1.1 1.35,1.1, height 1.2
ON--IC--SOT-23-5 [mm]
  rect 1.25x0.6 smd: 1(-1.25,0.95) 2(-1.25,0) 3(-1.25,-0.95) 4(1.25,-0.95) 5(1.25,0.95)
  silkscreen extent -1.88,1.5 -0.63,1.5, body extent -1.38,-1.5 1.38,1.5, height 1.1
ONS--IC--SOT-23 [mm]
  rect 0.9x0.8 smd: 1(-1,0.95) 2(-1,-0.95) 3(1,0)
  silkscreen extent -1.45,-1.55 1.45,1.55, body extent -1.25,-1.5 1.25,1.5, height 1.1
ONS--SD--SOD-923 [mm]
  rect 0.3x0.3 smd: 1(-0.45,0) 2(0.45,0)
  silkscreen extent -0.6,-0.3 0.6,0.3, body extent -0.53,-0.32 0.52,0.32, height 0.43